# Altium PCB PCB.PcbDoc (part 1 of 6)
Units mm, origin at the board's own origin, x right, y up, seen from the top; angles counter-clockwise.
Board outline 190 x 64 mm, 6 copper layers (SIG 1, GND 1, SIG 2, PWR, GND 2, SIG 3), stack 1.565 mm thick; 489 components, 387 nets, 1828 pads, 1817 vias.
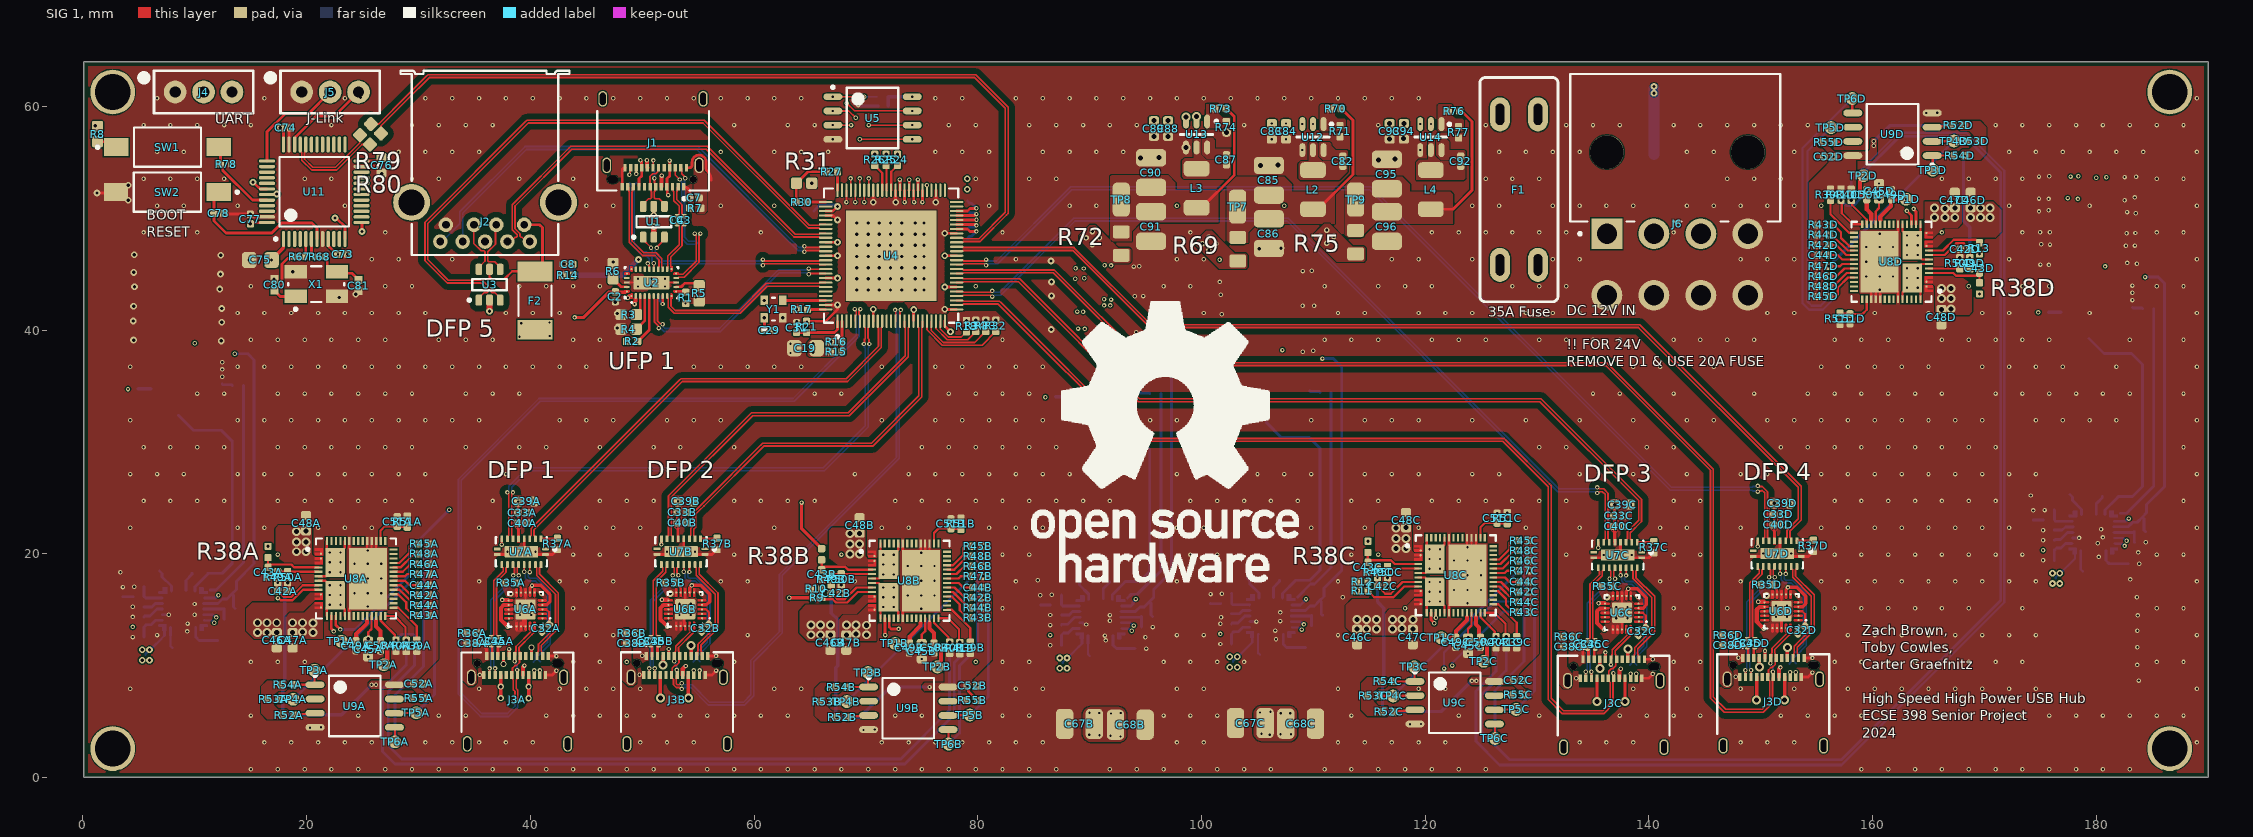
[diagram p0: SIG 1 view]
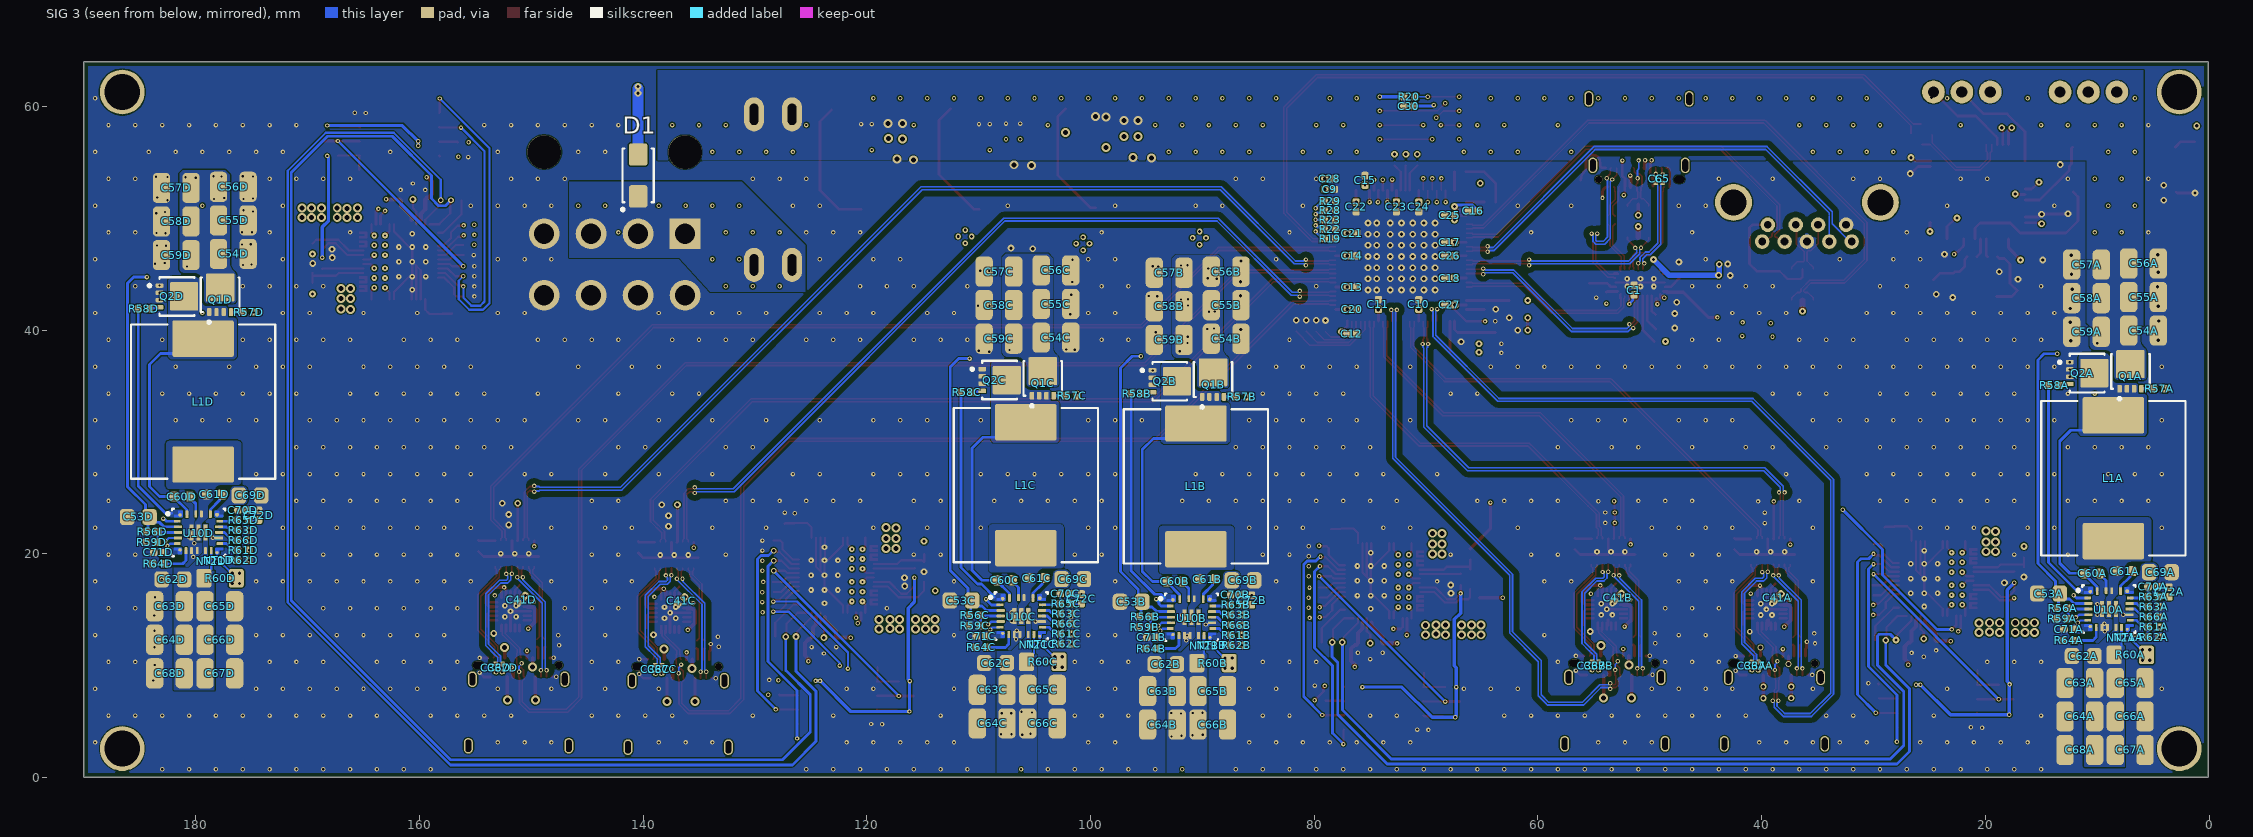
[diagram p1: SIG 3 view, seen from below]
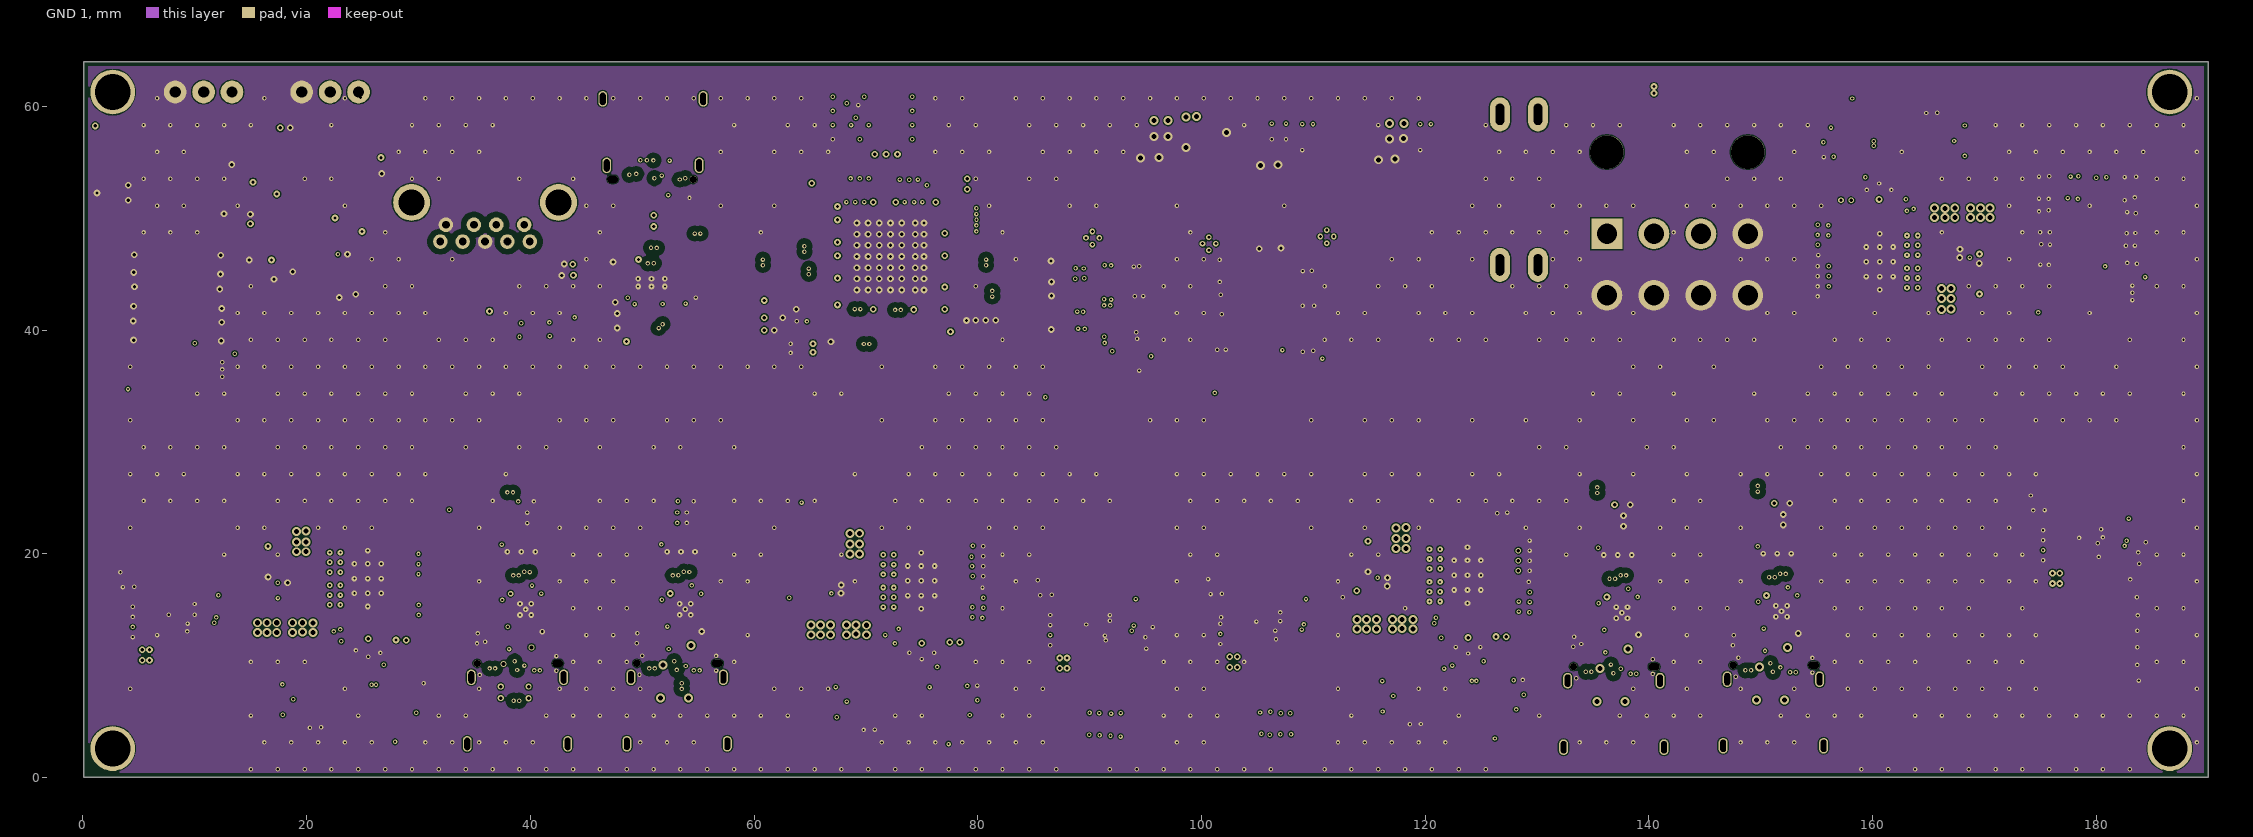
[diagram p2: GND 1]
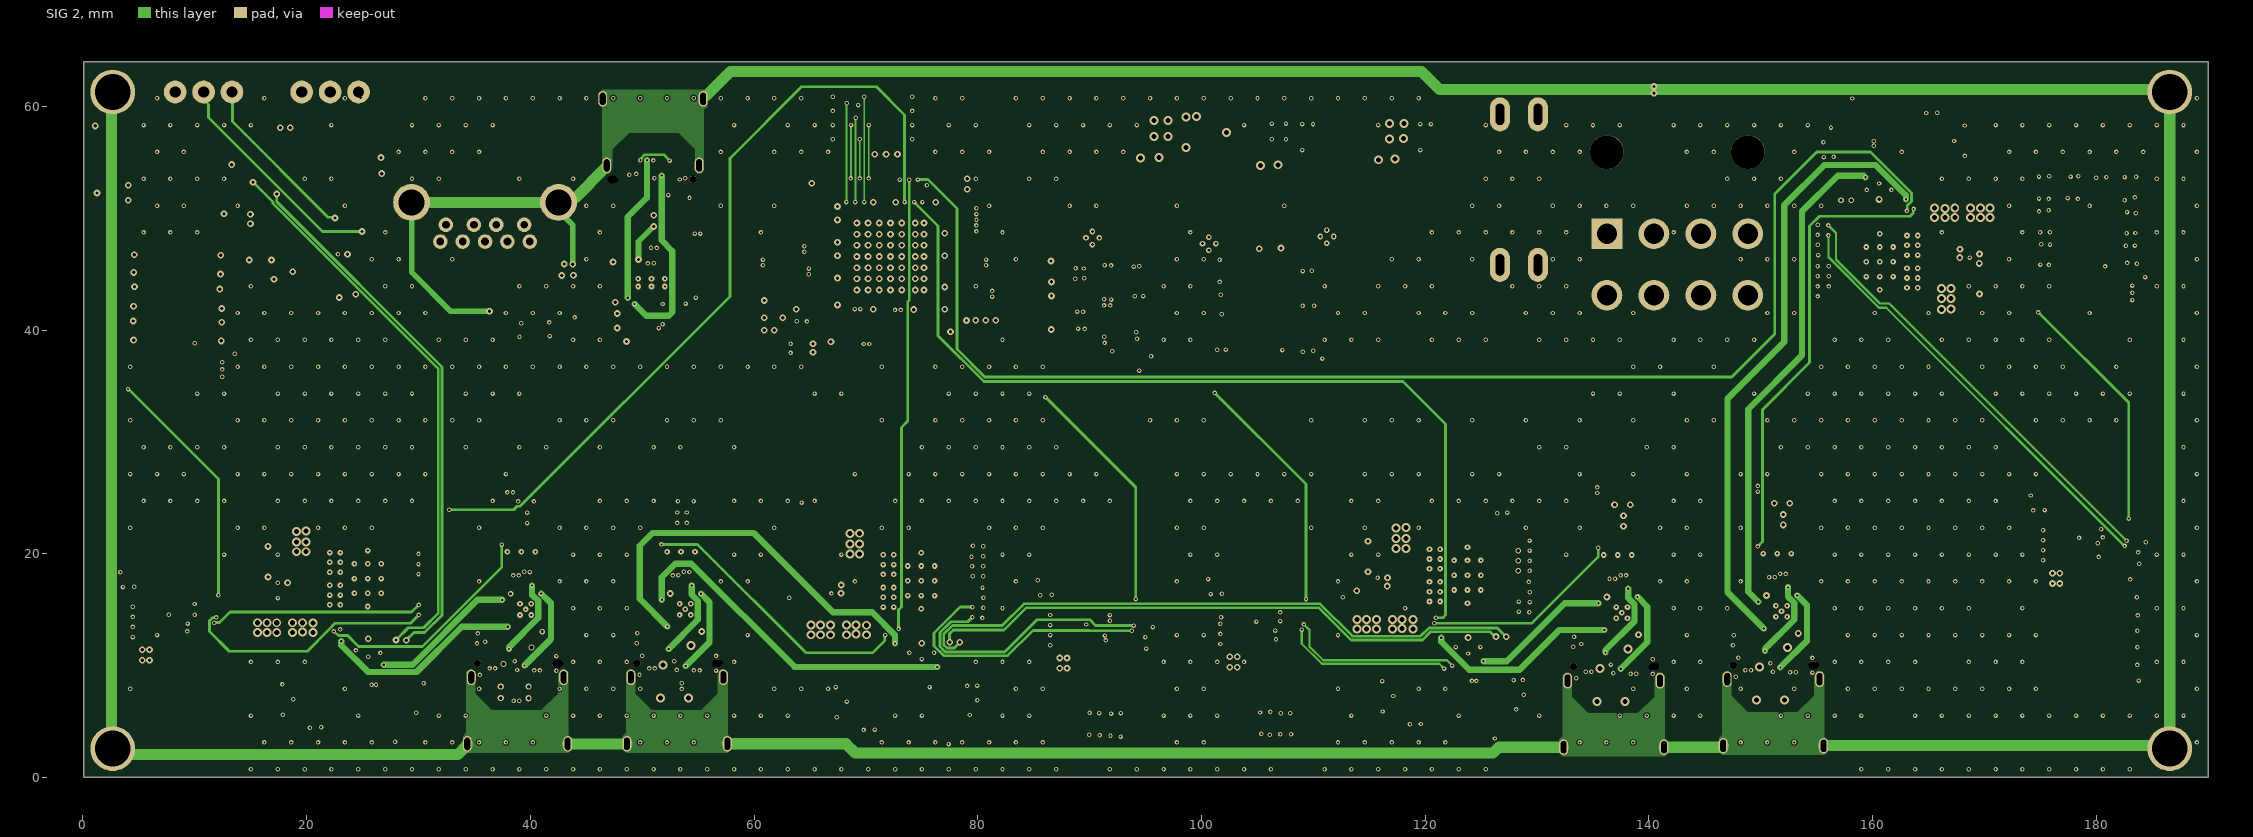
[diagram p3: SIG 2]
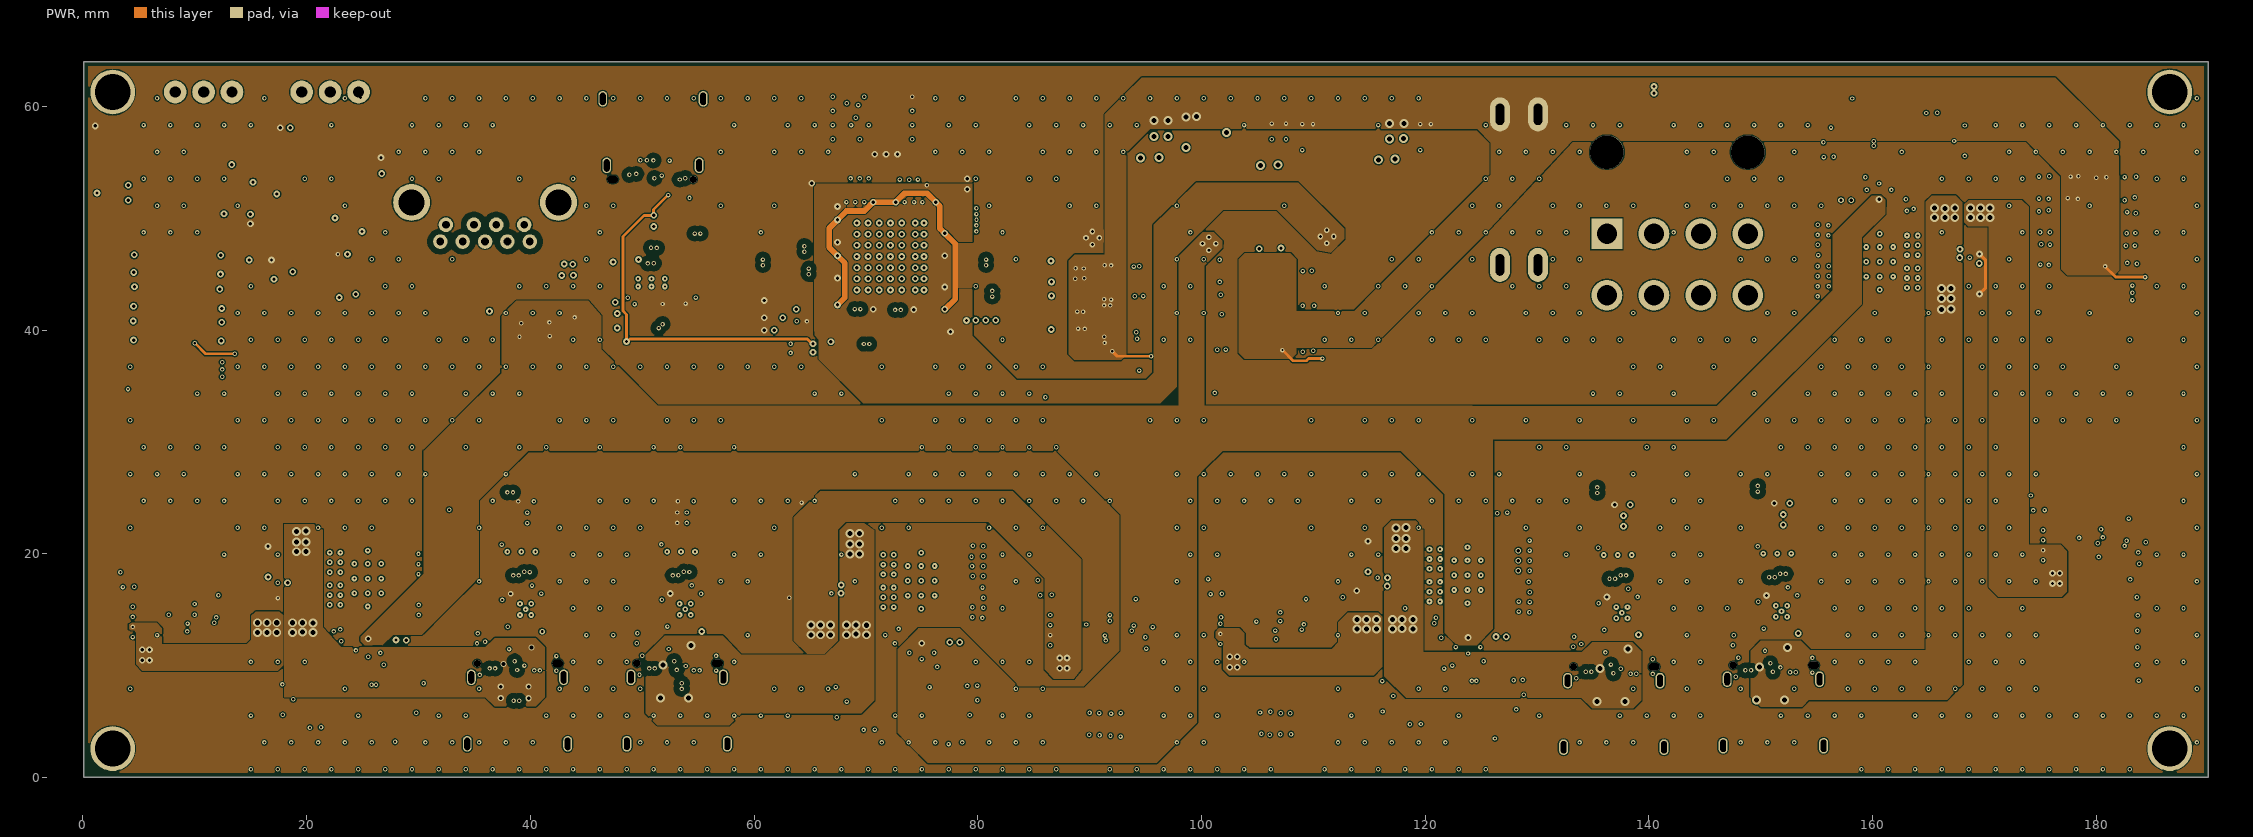
[diagram p4: PWR]
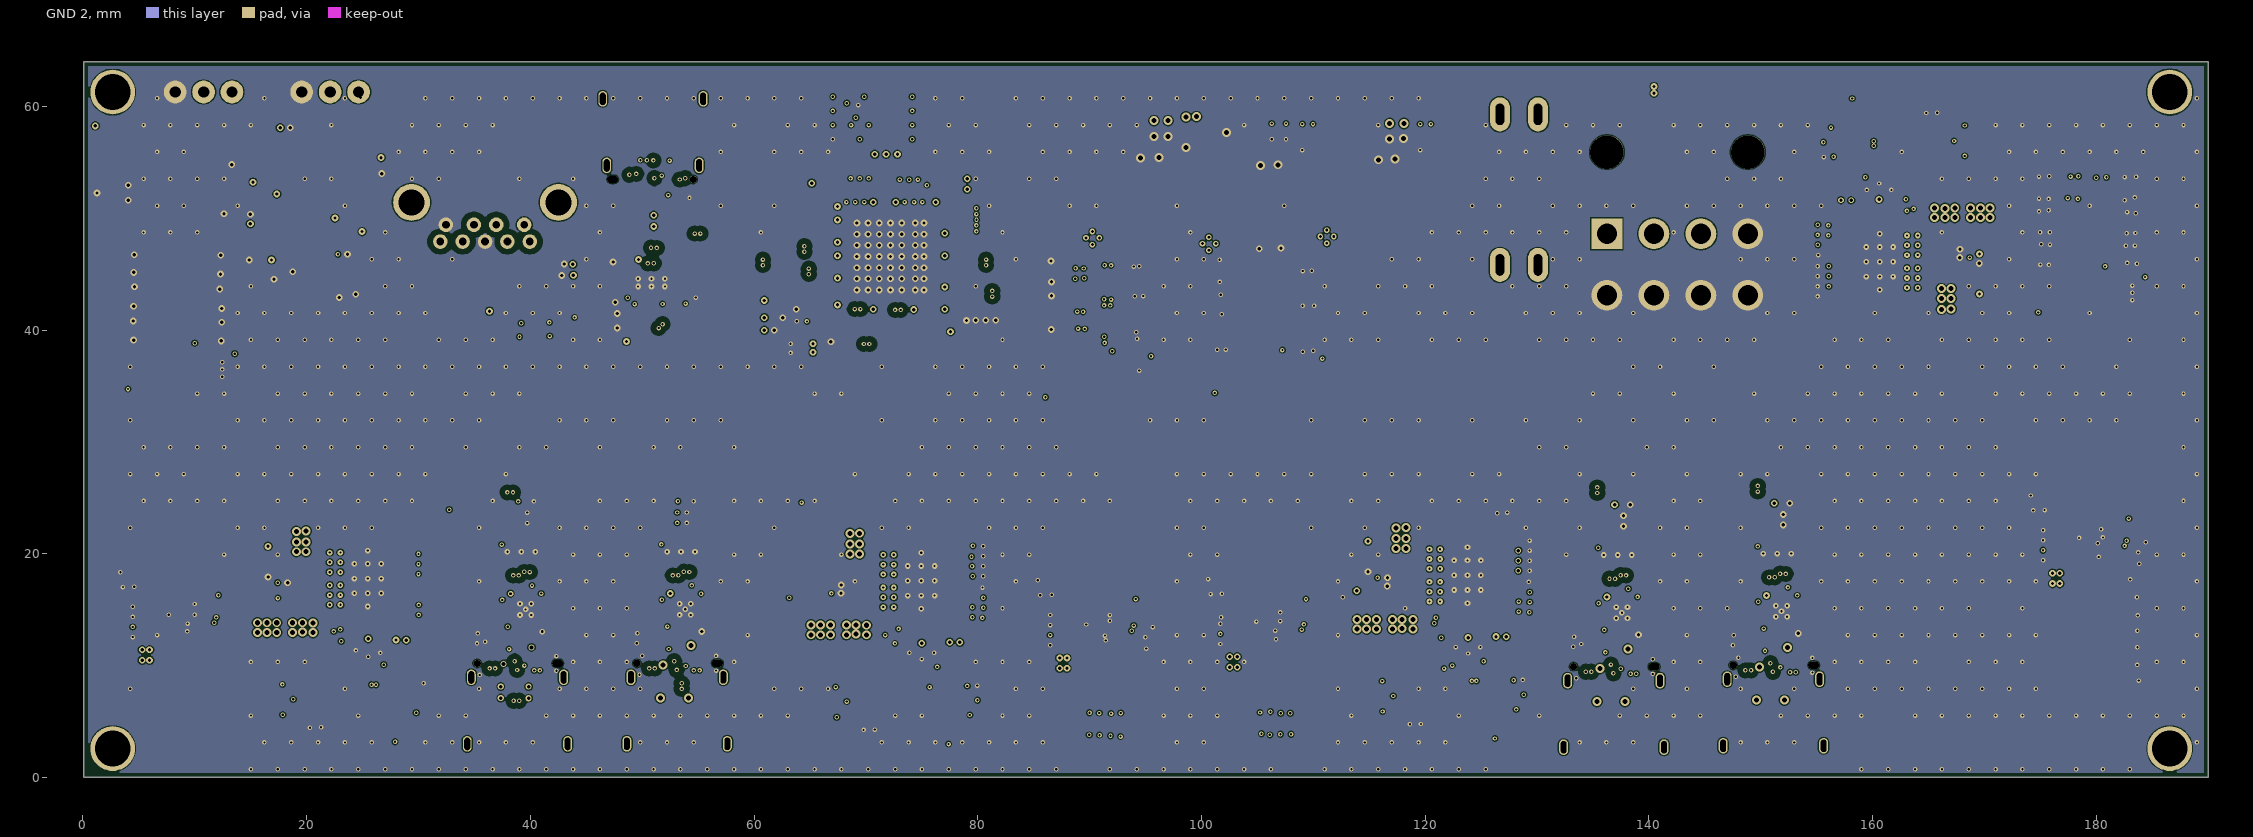
[diagram p5: GND 2]
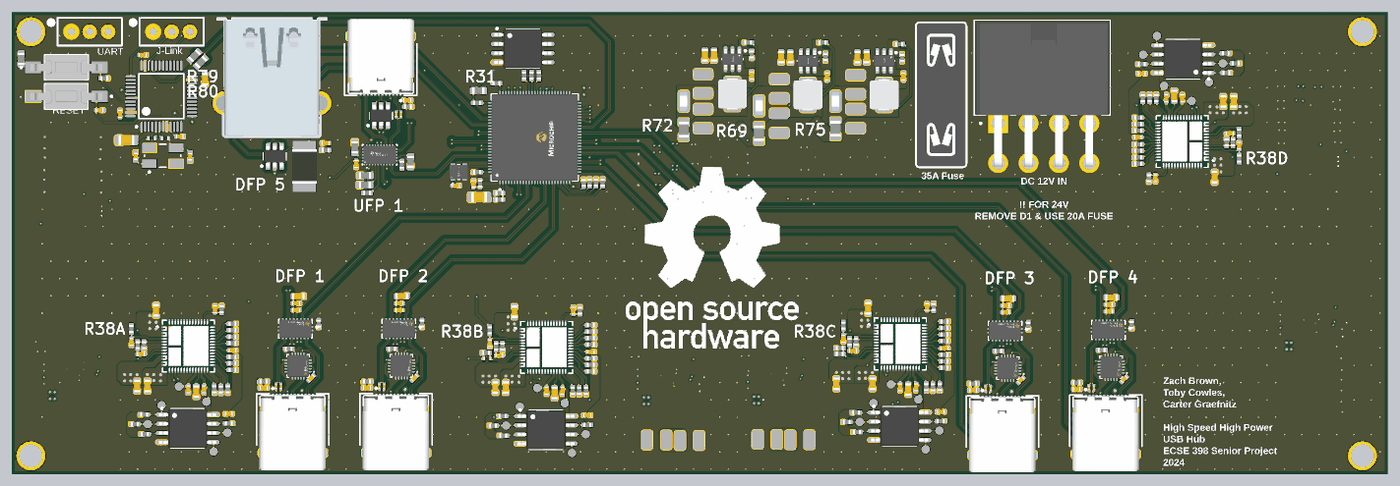
[diagram p11: 3D render of the assembled board from above, using the file's embedded part models]
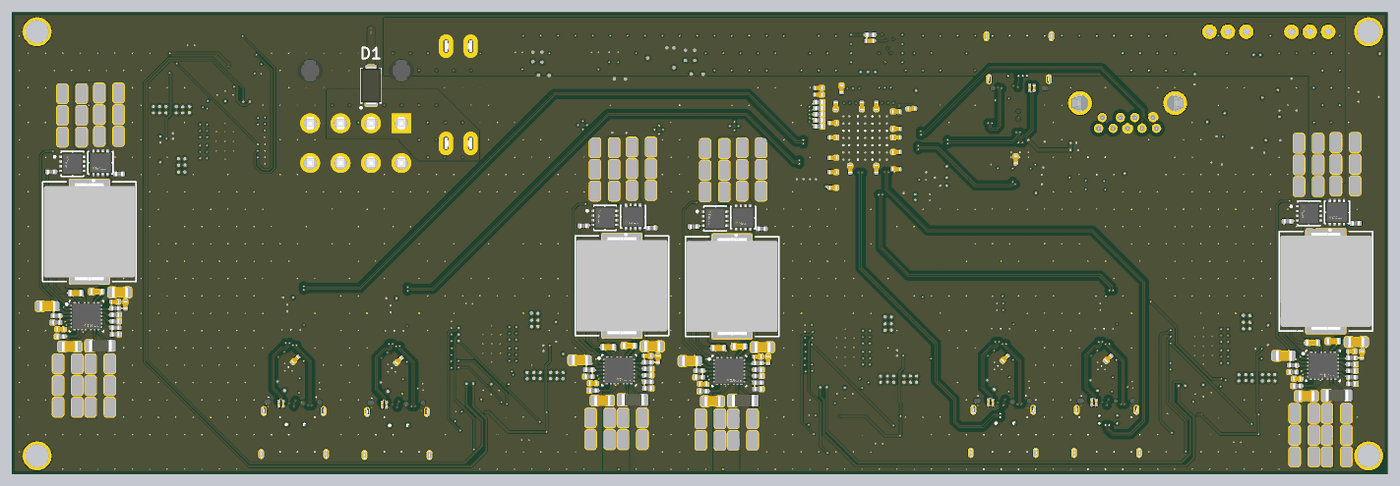
[diagram p12: 3D render of the assembled board from below, using the file's embedded part models]

## Layer stack, top to bottom
Top Solder: solder mask 0.0102, Solder Resist, Dk 3.8
SIG 1: signal copper 0.0356
Prepreg 1: prepreg 0.2104, PP-006, Dk 4.4
GND 1: signal copper 0.0175
Core 1: core 0.4, PP-006, Dk 4.6
SIG 2: signal copper 0.0175
Prepreg 2: dielectric 0.2028, FR-4, Dk 4.4
PWR: signal copper 0.0175
Core 2: core 0.4, PP-006, Dk 4.6
GND 2: signal copper 0.0175
Prepreg 3: prepreg 0.2104, PP-006, Dk 4.4
SIG 3: signal copper 0.0356
Bottom Solder: solder mask 0.0102, Solder Resist, Dk 3.8

## Board outline
0.05,0.03 0.05,64.03 190.05,64.03 190.05,0.03

## Design rules (kind name [scope] priority, off if disabled: settings)
BoardOutlineClearance [All] p1: gap=0.4 ignorepadtopadclearanceinfootprint=FALSE except(0: Arc-SplitContinuation Track-SplitContinuation SMDPad-SplitContinuation THPad-SplitContinuation Via-SplitContinuation Fill-SplitContinuation Poly-SplitContinuation Region-SplitContinuation Text-SplitContinuation)
Clearance "USB3 Clearance" [InPolygon vs InNetClass('USB3')] p1: gap=0.5 ignorepadtopadclearanceinfootprint=FALSE
Clearance "USB2 Clearance" [InPolygon vs InNetClass('USB2')] p2: gap=0.5 ignorepadtopadclearanceinfootprint=FALSE
Clearance "Global Clearance" [All] p3: gap=0.1 ignorepadtopadclearanceinfootprint=FALSE except(0.09: Arc-Arc Arc-Track Track-Track; 0.15: Arc-Text Track-Text SMDPad-SMDPad SMDPad-Text THPad-Text Via-Text Fill-Text Poly-Text Region-Text Text-Hole; 0.2: Arc-Hole Track-Hole)
ComponentClearance ComponentClearance_Pin_Headers [HasFootprint('HDDR_14x1_0')] p1: gap=0 collisioncheckmode=3 verticalgap=0 showdistances=FALSE
ComponentClearance [All] p2: gap=0.254 collisioncheckmode=3 verticalgap=0.254 showdistances=FALSE
DiffPairsRouting DiffPairsRouting_USB_2 [InNetClass('USB2')] p1: maxlimit=0.127 minlimit=0.102 mostfreqgap=0.102 toplayer_maxgap=0.102 toplayer_minwidth=0.152 toplayer_maxwidth=0.152 toplayer_prefwidth=0.152 midlayer2_maxgap=0.102 midlayer2_minwidth=0.152 midlayer2_maxwidth=0.152 midlayer2_prefwidth=0.152 midlayer3_maxgap=0.102 midlayer3_minwidth=0.152 midlayer3_maxwidth=0.152 midlayer3_prefwidth=0.152 bottomlayer_maxgap=0.102 bottomlayer_minwidth=0.152 bottomlayer_maxwidth=0.152 bottomlayer_prefwidth=0.152 impedanceprofiledriven=TRUE impedanceprofileid={6AC2E1D0-90B3-4429-8039-F66B67928875} impedanceprofilevalue=90.000000 maxuncoupledlength=0.762
DiffPairsRouting DiffPairsRouting_USB_3 [InNetClass('USB3')] p2: maxlimit=0.127 minlimit=0.102 mostfreqgap=0.102 toplayer_maxgap=0.102 toplayer_minwidth=0.152 toplayer_maxwidth=0.152 toplayer_prefwidth=0.152 midlayer2_maxgap=0.102 midlayer2_minwidth=0.152 midlayer2_maxwidth=0.152 midlayer2_prefwidth=0.152 midlayer3_maxgap=0.102 midlayer3_minwidth=0.152 midlayer3_maxwidth=0.152 midlayer3_prefwidth=0.152 bottomlayer_maxgap=0.102 bottomlayer_minwidth=0.152 bottomlayer_maxwidth=0.152 bottomlayer_prefwidth=0.152 impedanceprofiledriven=TRUE impedanceprofileid={6AC2E1D0-90B3-4429-8039-F66B67928875} impedanceprofilevalue=90.000000 maxuncoupledlength=0.254
HoleSize HoleSizePTH [IsPad] p1: absolutevalues=TRUE maxlimit=6.3 minlimit=0.5 maxpercent=80.000 minpercent=20.000
HoleSize HoleSizeVia [IsVia] p2: absolutevalues=TRUE maxlimit=6.3 minlimit=0.15 maxpercent=80.000 minpercent=20.000
HoleToHoleClearance ViaHoleToHoleClearance [IsVia vs IsVia] p1: gap=0.2 allowstackedmicrovias=TRUE
HoleToHoleClearance PTHHoleToHoleClearance [IsPad vs IsPad] p2: gap=0.45 allowstackedmicrovias=TRUE
MatchedLengths "USB 2 Matched Length" [InNetClass('USB2')] p1: tolerance=25.4 checknetsindiffpair=TRUE checkdiffpairvsdiffpair=FALSE checkxsignals=FALSE checkothers=FALSE usedelayunits=TRUE delaytolerance=100.000000
MatchedLengths "USB3 Matched Length" [InNetClass('USB3')] p2: tolerance=0.127 checknetsindiffpair=TRUE checkdiffpairvsdiffpair=FALSE checkxsignals=FALSE checkothers=FALSE usedelayunits=TRUE delaytolerance=15.000000
MinimumAnnularRing MinimumAnnularRingPTH [IsPad] p1: minimumring=0.2
MinimumAnnularRing MinimumAnnularRingVia [IsVia] p2: minimumring=0.1
MinimumSolderMaskSliver [All] p1: minsoldermaskwidth=0
PolygonConnect [All] p1: connectstyle=Direct reliefconductorwidth=0.254 reliefentries=4 polygonreliefangle="90 Angle" airgapwidth=0.254
ReturnPath [All] p1: impedanceprofileid={6AC2E1D0-90B3-4429-8039-F66B67928875} _gaplimit=0.127
RoomDefinition "PD ControllerB" [InComponentClass('PD ControllerB')] p1: confinementstyle=ConfineIn formatcopy=TRUE lockcomponents=FALSE outline 64.1,-0.154 82.8,-0.154 82.8,24.5 64.1,24.5
RoomDefinition "PD ControllerA" [InComponentClass('PD ControllerA')] p2: confinementstyle=ConfineIn formatcopy=TRUE lockcomponents=FALSE outline 14.6,0.046 33.3,0.046 33.3,24.7 14.6,24.7
RoomDefinition PORT4 [InComponentClass('PORT4')] p3: confinementstyle=ConfineIn formatcopy=TRUE lockcomponents=FALSE outline 146,0.1 156.3,0.1 156.3,26.058 146,26.058
RoomDefinition "PD ControllerD" [InComponentClass('PD ControllerD')] p4: confinementstyle=ConfineIn formatcopy=TRUE lockcomponents=FALSE outline 171.5,63.879 152.8,63.879 152.8,39.225 171.5,39.225
RoomDefinition "PD RegulatorB" [InComponentClass('PD RegulatorB')] p5: confinementstyle=ConfineIn formatcopy=TRUE lockcomponents=FALSE outline 83.184,47.026 83.184,0.29 97.916,0.29 97.916,47.026
RoomDefinition "PD RegulatorC" [InComponentClass('PD RegulatorC')] p6: confinementstyle=ConfineIn formatcopy=TRUE lockcomponents=FALSE outline 98.403,47.133 98.403,0.397 113.135,0.397 113.135,47.133
RoomDefinition "PD RegulatorD" [InComponentClass('PD RegulatorD')] p7: confinementstyle=ConfineIn formatcopy=TRUE lockcomponents=FALSE outline 171.964,54.611 171.964,7.875 186.696,7.875 186.696,54.611
RoomDefinition "PD RegulatorA" [InComponentClass('PD RegulatorA')] p8: confinementstyle=ConfineIn formatcopy=TRUE lockcomponents=FALSE outline 1.154,47.756 1.154,1.02 15.886,1.02 15.886,47.756
RoomDefinition HUB [InComponentClass('HUB')] p9: confinementstyle=ConfineIn formatcopy=TRUE lockcomponents=FALSE outline 57.3,35.55 90,35.55 90,62.55 57.3,62.55
RoomDefinition "UFP Type-C" [InComponentClass('UFP Type-C')] p10: confinementstyle=ConfineIn formatcopy=TRUE lockcomponents=FALSE outline 57.443,63.478 43.6,63.478 43.6,29.075 57.443,29.075
RoomDefinition Main [InComponentClass('Main')] p11: confinementstyle=ConfineIn formatcopy=TRUE lockcomponents=FALSE outline 44.725,63.504 26.75,63.504 26.75,39.175 44.725,39.175
RoomDefinition PORT1 [InComponentClass('PORT1')] p12: confinementstyle=ConfineIn formatcopy=TRUE lockcomponents=FALSE outline 33.7,0.267 44,0.267 44,26.225 33.7,26.225
RoomDefinition PORT3 [InComponentClass('PORT3')] p13: confinementstyle=ConfineIn formatcopy=TRUE lockcomponents=FALSE outline 131.73,-0.028 142.03,-0.028 142.03,25.93 131.73,25.93
RoomDefinition PORT2 [InComponentClass('PORT2')] p14: confinementstyle=ConfineIn formatcopy=TRUE lockcomponents=FALSE outline 47.975,0.275 58.275,0.275 58.275,26.233 47.975,26.233
RoomDefinition Power [InComponentClass('Power')] p15: confinementstyle=ConfineIn formatcopy=TRUE lockcomponents=FALSE outline 91.694,41.275 152.4,41.275 152.4,63.5 91.694,63.5
RoomDefinition "PD ControllerC" [InComponentClass('PD ControllerC')] p16: confinementstyle=ConfineIn formatcopy=TRUE lockcomponents=FALSE outline 112.95,0.5 131.65,0.5 131.65,25 112.95,25
RoomDefinition Microcontroller [InComponentClass('Microcontroller')] p17: confinementstyle=ConfineIn formatcopy=TRUE lockcomponents=FALSE outline -0.093,41.515 29.447,41.515 29.447,63.5 -0.093,63.5
RoutingVias [All] p1: holewidth=0.2 width=0.4 viastyle="Through Hole" minholewidth=0.15 minwidth=0.25 maxholewidth=6.3 maxwidth=6.3
SilkToSilkClearance [All] p1: silktosilkclearance=0
SilkToSolderMaskClearance [IsPad] p1: minsilkscreentomaskgap=0.15 clearancetoexposedcopper=TRUE
SolderMaskExpansion [All] p1: expansion=0.102 istentingtop=FALSE
SupplyNets "Schematic Supply Nets_7" [InNet('VINUP')] p1: voltage=0.000
SupplyNets "Schematic Supply Nets_6" [InNet('GND')] p2: voltage=0.000
SupplyNets "Schematic Supply Nets_5" [InNet('P5V0')] p3: voltage=0.000
SupplyNets "Schematic Supply Nets_4" [InNet('P1V1')] p4: voltage=0.000
SupplyNets "Schematic Supply Nets_3" [InNet('P3V3')] p5: voltage=0.000
SupplyNets "Schematic Supply Nets_2" [InNet('VIN')] p6: voltage=0.000
SupplyNets "Schematic Supply Nets_1" [InNet('P5V0_UFP')] p7: voltage=0.000
SupplyNets "Schematic Supply Nets" [InNet('CHASSIS')] p8: voltage=0.000
Width Width_CC [InNetClass('CC')] p1: maxlimit=0.563 minlimit=0.254 preferedwidth=0.563 toplayer_minwidth=0.367 toplayer_maxwidth=0.367 toplayer_prefwidth=0.367 midlayer2_minwidth=0.563 midlayer3_minwidth=0.563 bottomlayer_minwidth=0.367 bottomlayer_maxwidth=0.367 bottomlayer_prefwidth=0.367 impedanceprofiledriven=TRUE impedanceprofileid={2896DB28-B6F7-41C2-A94A-582FE85EF1DA} impedanceprofilevalue=50.000000 minimp=50.000000 maximp=50.000000 favimp=50.000000 // 50 Ohm Impedance for CC nets
Width [All] p2: maxlimit=10 minlimit=0.09 preferedwidth=0.25 midlayer1_minwidth=0.15 midlayer2_minwidth=0.15 midlayer3_minwidth=0.15 midlayer4_minwidth=0.15 minimp=50.000000 maximp=50.000000 favimp=50.000000
23 further rules are at their usual default settings.

## Classes and differential pairs
net class CC: C_CC1A C_CC1B C_CC1C C_CC1D C_CC2A C_CC2B C_CC2C C_CC2D CC1A CC1B CC1C CC1D CC2A CC2B CC2C CC2D
net class USB3: C_USB3_TX1_N C_USB3_TX1_P C_USB3_TX2_N C_USB3_TX2_P DP1_USB3_RX_N DP1_USB3_RX_P DP1_USB3_TX_N DP1_USB3_TX_P DP2_USB3_RX_N DP2_USB3_RX_P DP2_USB3_TX_N DP2_USB3_TX_P DP3_USB3_RX_N DP3_USB3_RX_P DP3_USB3_TX_N DP3_USB3_TX_P DP4_USB3_RX_N DP4_USB3_RX_P DP4_USB3_TX_N DP4_USB3_TX_P DP5_USB3_RX_N DP5_USB3_RX_P DP5_USB3_TX_N DP5_USB3_TX_P UP_USB3_RX_N UP_USB3_RX_P UP_USB3_TX_N UP_USB3_TX_P USB3_RX1_N USB3_RX1_P USB3_RX1A_N USB3_RX1A_P USB3_RX1B_N USB3_RX1B_P USB3_RX1C_N USB3_RX1C_P USB3_RX1D_N USB3_RX1D_P USB3_RX2_N USB3_RX2_P USB3_RX2A_N USB3_RX2A_P USB3_RX2B_N USB3_RX2B_P USB3_RX2C_N USB3_RX2C_P USB3_RX2D_N USB3_RX2D_P USB3_TX1_N USB3_TX1_P USB3_TX1A_N USB3_TX1A_P USB3_TX1B_N USB3_TX1B_P USB3_TX1C_N USB3_TX1C_P USB3_TX1D_N USB3_TX1D_P USB3_TX2_N USB3_TX2_P USB3_TX2A_N USB3_TX2A_P USB3_TX2B_N USB3_TX2B_P USB3_TX2C_N USB3_TX2C_P USB3_TX2D_N USB3_TX2D_P
net class USB2: AD_N AD_P C_USB2_N C_USB2_P DP1_USB2_N DP1_USB2_P DP2_USB2_N DP2_USB2_P DP3_USB2_N DP3_USB2_P DP4_USB2_N DP4_USB2_P DP5_USB2_N DP5_USB2_P DP6_USB2_N DP6_USB2_P UP_USB2_N UP_USB2_P
component class "PD RegulatorD": C53D C54D C55D C56D C57D C58D C59D C60D C61D C62D C63D C64D C65D C66D C67D C68D C69D C70D C71D C72D L1D NT1D NT2D Q1D Q2D R56D R57D R58D R59D R60D R61D R62D R63D R64D R65D R66D U10D
component class "PD RegulatorC": C53C C54C C55C C56C C57C C58C C59C C60C C61C C62C C63C C64C C65C C66C C67C C68C C69C C70C C71C C72C L1C NT1C NT2C Q1C Q2C R56C R57C R58C R59C R60C R61C R62C R63C R64C R65C R66C U10C
component class "PD RegulatorB": C53B C54B C55B C56B C57B C58B C59B C60B C61B C62B C63B C64B C65B C66B C67B C68B C69B C70B C71B C72B L1B NT1B NT2B Q1B Q2B R56B R57B R58B R59B R60B R61B R62B R63B R64B R65B R66B U10B
component class "PD RegulatorA": C53A C54A C55A C56A C57A C58A C59A C60A C61A C62A C63A C64A C65A C66A C67A C68A C69A C70A C71A C72A L1A NT1A NT2A Q1A Q2A R56A R57A R58A R59A R60A R61A R62A R63A R64A R65A R66A U10A
component class "PD ControllerD": C42D C43D C44D C45D C46D C47D C48D C49D C50D C51D C52D R13 R38D R39D R40D R41D R42D R43D R44D R45D R46D R47D R48D R49D R50D R51D R52D R53D R54D R55D TP1D TP2D TP3D TP4D TP5D TP6D U8D U9D
component class "PD ControllerC": C42C C43C C44C C45C C46C C47C C48C C49C C50C C51C C52C R11 R12 R38C R39C R40C R41C R42C R43C R44C R45C R46C R47C R48C R49C R50C R51C R52C R53C R54C R55C TP1C TP2C TP3C TP4C TP5C TP6C U8C U9C
component class "PD ControllerB": C42B C43B C44B C45B C46B C47B C48B C49B C50B C51B C52B R9 R10 R38B R39B R40B R41B R42B R43B R44B R45B R46B R47B R48B R49B R50B R51B R52B R53B R54B R55B TP1B TP2B TP3B TP4B TP5B TP6B U8B U9B
component class "PD ControllerA": C42A C43A C44A C45A C46A C47A C48A C49A C50A C51A C52A R38A R39A R40A R41A R42A R43A R44A R45A R46A R47A R48A R49A R50A R51A R52A R53A R54A R55A TP1A TP2A TP3A TP4A TP5A TP6A U8A U9A
component class Power: C82 C83 C84 C85 C86 C87 C88 C89 C90 C91 C92 C93 C94 C95 C96 D1 F1 J6 L2 L3 L4 R69 R70 R71 R72 R73 R74 R75 R76 R77 TP7 TP8 TP9 U12 U13 U14
component class Main: C8 F2 J2 R14 U3
differential pair class DIFF90: C_USB2 C_USB3_TX1 C_USB3_TX1A C_USB3_TX1B C_USB3_TX1C C_USB3_TX1D C_USB3_TX2 C_USB3_TX2A C_USB3_TX2B C_USB3_TX2C C_USB3_TX2D DP1_USB2 DP1_USB3_RX DP1_USB3_TX DP2_USB2 DP2_USB3_RX DP2_USB3_TX DP3_USB2 DP3_USB3_RX DP3_USB3_TX DP4_USB2 DP4_USB3_RX DP4_USB3_TX DP5_USB2 DP5_USB3_RX DP5_USB3_TX DP6_USB2 UP_USB2 UP_USB3_RX UP_USB3_TX USB3_RX1 USB3_RX1A USB3_RX1B USB3_RX1C USB3_RX1D USB3_RX2 USB3_RX2A USB3_RX2B USB3_RX2C USB3_RX2D USB3_TX1 USB3_TX1A USB3_TX1B USB3_TX1C USB3_TX1D USB3_TX2 USB3_TX2A USB3_TX2B USB3_TX2C USB3_TX2D
channel class "PD Regulator": "PD RegulatorA" "PD RegulatorB" "PD RegulatorC" "PD RegulatorD"
channel class "PD Controller": "PD ControllerA" "PD ControllerB" "PD ControllerC" "PD ControllerD"
channel class DFP: PORT1 PORT2 PORT3 PORT4
component class "UFP Type-C": C1 C2 C3 C4 C5 C6 C7 J1 R1 R2 R3 R4 R5 R6 R7 U1 U2
component class PORT4: C32D C33D C34D C35D C36D C37D C38D C39D C40D C41D J3D R35D R36D R37D U6D U7D
component class PORT3: C32C C33C C34C C35C C36C C37C C38C C39C C40C C41C J3C R35C R36C R37C U6C U7C
component class PORT2: C32B C33B C34B C35B C36B C37B C38B C39B C40B C41B J3B R35B R36B R37B U6B U7B
component class PORT1: C32A C33A C34A C35A C36A C37A C38A C39A C40A C41A J3A R35A R36A R37A U6A U7A
component class Microcontroller: C73 C74 C75 C76 C77 C78 C80 C81 J4 J5 R8 R67 R68 R78 R79 R80 SW1 SW2 U11 X1
component class HUB: C9 C10 C11 C12 C13 C14 C15 C16 C17 C18 C19 C20 C21 C22 C23 C24 C25 C26 C27 C28 C29 C30 C31 R15 R16 R17 R18 R19 R20 R21 R22 R23 R24 R25 R26 R27 R28 R29 R30 R31 R32 R33 R34 U4 U5 Y1
differential pair ST_USB2_D: +ST_USB2_D_P -ST_USB2_D_N
differential pair AD: +AD_P -AD_N
differential pair USB3_TX2D: +USB3_TX2D_P -USB3_TX2D_N
differential pair USB3_TX2C: +USB3_TX2C_P -USB3_TX2C_N
differential pair USB3_TX2B: +USB3_TX2B_P -USB3_TX2B_N
differential pair USB3_TX2A: +USB3_TX2A_P -USB3_TX2A_N
differential pair USB3_TX1D: +USB3_TX1D_P -USB3_TX1D_N
differential pair USB3_TX1C: +USB3_TX1C_P -USB3_TX1C_N
differential pair USB3_TX1B: +USB3_TX1B_P -USB3_TX1B_N
differential pair USB3_TX1A: +USB3_TX1A_P -USB3_TX1A_N
differential pair USB3_RX2D: +USB3_RX2D_P -USB3_RX2D_N
differential pair USB3_RX2C: +USB3_RX2C_P -USB3_RX2C_N
differential pair USB3_RX2B: +USB3_RX2B_P -USB3_RX2B_N
differential pair USB3_RX2A: +USB3_RX2A_P -USB3_RX2A_N
differential pair USB3_RX1D: +USB3_RX1D_P -USB3_RX1D_N
differential pair USB3_RX1C: +USB3_RX1C_P -USB3_RX1C_N
differential pair USB3_RX1B: +USB3_RX1B_P -USB3_RX1B_N
differential pair USB3_RX1A: +USB3_RX1A_P -USB3_RX1A_N
differential pair C_USB3_TX2D: +C_USB3_TX2D_P -C_USB3_TX2D_N
differential pair C_USB3_TX2C: +C_USB3_TX2C_P -C_USB3_TX2C_N
differential pair C_USB3_TX2B: +C_USB3_TX2B_P -C_USB3_TX2B_N
differential pair C_USB3_TX2A: +C_USB3_TX2A_P -C_USB3_TX2A_N
differential pair C_USB3_TX1D: +C_USB3_TX1D_P -C_USB3_TX1D_N
differential pair C_USB3_TX1C: +C_USB3_TX1C_P -C_USB3_TX1C_N
differential pair C_USB3_TX1B: +C_USB3_TX1B_P -C_USB3_TX1B_N
differential pair C_USB3_TX1A: +C_USB3_TX1A_P -C_USB3_TX1A_N
differential pair USB3_TX2: +USB3_TX2_P -USB3_TX2_N
differential pair USB3_TX1: +USB3_TX1_P -USB3_TX1_N
differential pair USB3_RX2: +USB3_RX2_P -USB3_RX2_N
differential pair USB3_RX1: +USB3_RX1_P -USB3_RX1_N
differential pair C_USB3_TX2: +C_USB3_TX2_P -C_USB3_TX2_N
differential pair C_USB3_TX1: +C_USB3_TX1_P -C_USB3_TX1_N
differential pair C_USB2: +C_USB2_P -C_USB2_N
differential pair UP_USB3_TX: +UP_USB3_TX_P -UP_USB3_TX_N
differential pair UP_USB3_RX: +UP_USB3_RX_P -UP_USB3_RX_N
differential pair UP_USB2: +UP_USB2_P -UP_USB2_N
differential pair DP6_USB2: +DP6_USB2_P -DP6_USB2_N
differential pair DP5_USB3_TX: +DP5_USB3_TX_P -DP5_USB3_TX_N
differential pair DP5_USB3_RX: +DP5_USB3_RX_P -DP5_USB3_RX_N
differential pair DP5_USB2: +DP5_USB2_P -DP5_USB2_N
differential pair DP4_USB3_TX: +DP4_USB3_TX_P -DP4_USB3_TX_N
differential pair DP4_USB3_RX: +DP4_USB3_RX_P -DP4_USB3_RX_N
differential pair DP4_USB2: +DP4_USB2_P -DP4_USB2_N
differential pair DP3_USB3_TX: +DP3_USB3_TX_P -DP3_USB3_TX_N
differential pair DP3_USB3_RX: +DP3_USB3_RX_P -DP3_USB3_RX_N
differential pair DP3_USB2: +DP3_USB2_P -DP3_USB2_N
differential pair DP2_USB3_TX: +DP2_USB3_TX_P -DP2_USB3_TX_N
differential pair DP2_USB3_RX: +DP2_USB3_RX_P -DP2_USB3_RX_N
differential pair DP2_USB2: +DP2_USB2_P -DP2_USB2_N
differential pair DP1_USB3_TX: +DP1_USB3_TX_P -DP1_USB3_TX_N
differential pair DP1_USB3_RX: +DP1_USB3_RX_P -DP1_USB3_RX_N
differential pair DP1_USB2: +DP1_USB2_P -DP1_USB2_N

## Components (designator, comment, footprint, x,y, rotation, side; value= is the part's Value field where it differs from the comment)
C1 "100nF 16V 0402" CAPC1005X06N 51.4,43.6 r270 bottom value=100n
C2 "100nF 16V 0402" CAPC1005X06N 47.6,43 r90 top value=100n
C3 "100nF 10V 0201" CAPC0603X03N 53.757,49.857 r90 top value=100n
C4 "100nF 10V 0201" CAPC0603X03N 53.122,49.857 r90 top value=100n
C5 "100nF 10V 0201" CAPC0603X03N 48.848,53.546 r90 bottom value=100n
C6 "100nF 10V 0201" CAPC0603X03N 49.467,53.538 r90 bottom value=100n
C7 "100nF 16V 0402" CAPC1005X06N 54.661,51.833 r0 top value=100n
C8 "100nF 16V 0402" CAPC1005X06N 43.375,45.9 r180 top value=100n
C9 "4.7uF 10V 0402" CAPC1005X06N 78.632,52.6 r180 bottom value=4u7
C10 "100nF 16V 0402" CAPC1005X06N 70.662,42.307 r270 bottom value=100n
C11 "100nF 16V 0402" CAPC1005X06N 74.262,42.307 r270 bottom value=100n
C12 "100nF 16V 0402" CAPC1005X06N 76.632,39.7 r0 bottom value=100n
C13 "100nF 16V 0402" CAPC1005X06N 76.624,43.869 r0 bottom value=100n
C14 "100nF 16V 0402" CAPC1005X06N 76.624,46.669 r0 bottom value=100n
C15 "100nF 16V 0402" CAPC1005X06N 75.462,53.409 r270 bottom value=100n
C16 "100nF 16V 0402" CAPC1005X06N 65.782,50.669 r180 bottom value=100n
C17 "100nF 16V 0402" CAPC1005X06N 67.9,47.869 r180 bottom value=100n
C18 "100nF 16V 0402" CAPC1005X06N 67.9,44.669 r180 bottom value=100n
C19 "2.2uF 50V 0805" CAPC2012X14N 64.6,38.4 r180 top value=2u2
C20 "100nF 16V 0402" CAPC1005X06N 76.624,41.869 r0 bottom value=100n
C21 "100nF 16V 0402" CAPC1005X06N 76.624,48.669 r0 bottom value=100n
C22 "100nF 16V 0402" CAPC1005X06N 76.262,51.031 r90 bottom value=100n
C23 "100nF 16V 0402" CAPC1005X06N 72.662,51.031 r90 bottom value=100n
C24 "100nF 16V 0402" CAPC1005X06N 70.662,51.031 r90 bottom value=100n
C25 "100nF 16V 0402" CAPC1005X06N 67.9,50.265 r180 bottom value=100n
C26 "100nF 16V 0402" CAPC1005X06N 67.9,46.669 r180 bottom value=100n
C27 "100nF 16V 0402" CAPC1005X06N 67.9,42.275 r180 bottom value=100n
C28 "4.7uF 10V 0402" CAPC1005X06N 78.632,53.546 r180 bottom value=4u7
C29 "100nF 16V 0402" CAPC1005X06N 61.355,40 r0 top value=100n
C30 "100nF 16V 0402" CAPC1005X06N 71.57,60.05 r0 bottom value=100n
C31 "10n 50V X7R 0402" CAPC1005X06N 63.8,40.245 r90 top value=10n
C32A "100nF 16V 0402" CAPC1005X06N 41.366,13.366 r45 top value=100n (schematic designator C32)
C32B "100nF 16V 0402" CAPC1005X06N 55.641,13.374 r45 top value=100n (schematic designator C32)
C32C "100nF 16V 0402" CAPC1005X06N 139.397,13.071 r45 top value=100n (schematic designator C32)
C32D "100nF 16V 0402" CAPC1005X06N 153.666,13.199 r45 top value=100n (schematic designator C32)
C33A "1uF 16V X5R 0402" CAPC1005X06N 39.29,23.7 r0 top value=1u (schematic designator C33)
C33B "1uF 16V X5R 0402" CAPC1005X06N 53.565,23.708 r0 top value=1u (schematic designator C33)
C33C "1uF 16V X5R 0402" CAPC1005X06N 137.321,23.405 r0 top value=1u (schematic designator C33)
C33D "1uF 16V X5R 0402" CAPC1005X06N 151.59,23.533 r0 top value=1u (schematic designator C33)
C34A "100nF 10V 0201" CAPC0603X03N 36.5,12.2 r90 top value=100n (schematic designator C34)
C34B "100nF 10V 0201" CAPC0603X03N 50.775,12.208 r90 top value=100n (schematic designator C34)
C34C "100nF 10V 0201" CAPC0603X03N 134.53,11.905 r90 top value=100n (schematic designator C34)
C34D "100nF 10V 0201" CAPC0603X03N 148.8,12.033 r90 top value=100n (schematic designator C34)
C35A "100nF 10V 0201" CAPC0603X03N 37.2,12.2 r90 top value=100n (schematic designator C35)
C35B "100nF 10V 0201" CAPC0603X03N 51.475,12.208 r90 top value=100n (schematic designator C35)
C35C "100nF 10V 0201" CAPC0603X03N 135.23,11.905 r90 top value=100n (schematic designator C35)
C35D "100nF 10V 0201" CAPC0603X03N 149.5,12.033 r90 top value=100n (schematic designator C35)
C36A "100nF 10V 0201" CAPC0603X03N 40.9,10 r90 bottom value=100n (schematic designator C36)
C36B "100nF 10V 0201" CAPC0603X03N 55.175,10.008 r90 bottom value=100n (schematic designator C36)
C36C "100nF 10V 0201" CAPC0603X03N 138.93,9.705 r90 bottom value=100n (schematic designator C36)
C36D "100nF 10V 0201" CAPC0603X03N 153.2,9.833 r90 bottom value=100n (schematic designator C36)
C37A "100nF 10V 0201" CAPC0603X03N 40.282,9.982 r90 bottom value=100n (schematic designator C37)
C37B "100nF 10V 0201" CAPC0603X03N 54.557,9.991 r90 bottom value=100n (schematic designator C37)
C37C "100nF 10V 0201" CAPC0603X03N 138.313,9.688 r90 bottom value=100n (schematic designator C37)
C37D "100nF 10V 0201" CAPC0603X03N 152.582,9.816 r90 bottom value=100n (schematic designator C37)
C38A "100nF 16V 0402" CAPC1005X06N 34.8,12 r180 top value=100n (schematic designator C38)
C38B "100nF 16V 0402" CAPC1005X06N 49.075,12.008 r180 top value=100n (schematic designator C38)
C38C "100nF 16V 0402" CAPC1005X06N 132.83,11.705 r180 top value=100n (schematic designator C38)
C38D "100nF 16V 0402" CAPC1005X06N 147.1,11.833 r180 top value=100n (schematic designator C38)
C39A "1nF C0G 0603" CAPC1608X08N 39.62,24.7 r0 top value=1n (schematic designator C39)
C39B "1nF C0G 0603" CAPC1608X08N 53.895,24.708 r0 top value=1n (schematic designator C39)
C39C "1nF C0G 0603" CAPC1608X08N 137.651,24.405 r0 top value=1n (schematic designator C39)
C39D "1nF C0G 0603" CAPC1608X08N 151.92,24.533 r0 top value=1n (schematic designator C39)
C40A "100nF 16V 0402" CAPC1005X06N 39.29,22.764 r0 top value=100n (schematic designator C40)
C40B "100nF 16V 0402" CAPC1005X06N 53.565,22.772 r0 top value=100n (schematic designator C40)
C40C "100nF 16V 0402" CAPC1005X06N 137.321,22.47 r0 top value=100n (schematic designator C40)
C40D "100nF 16V 0402" CAPC1005X06N 151.59,22.597 r0 top value=100n (schematic designator C40)
C41A "10uF 10V 0402" CAPC1005X06N 38.593,16.094 r315 bottom value=10u (schematic designator C41)
C41B "10uF 10V 0402" CAPC1005X06N 52.868,16.102 r315 bottom value=10u (schematic designator C41)
C41C "10uF 10V 0402" CAPC1005X06N 136.624,15.8 r315 bottom value=10u (schematic designator C41)
C41D "10uF 10V 0402" CAPC1005X06N 150.893,15.927 r315 bottom value=10u (schematic designator C41)
C42A "10uF 10V 0402" CAPC1005X06N 17.85,16.675 r0 top value=10u (schematic designator C42)
C42B "10uF 10V 0402" CAPC1005X06N 67.35,16.475 r0 top value=10u (schematic designator C42)
C42C "10uF 10V 0402" CAPC1005X06N 116.2,17.129 r0 top value=10u (schematic designator C42)
C42D "10uF 10V 0402" CAPC1005X06N 168.267,47.25 r180 top value=10u (schematic designator C42)
C43A "10uF 10V 0402" CAPC1005X06N 16.55,18.375 r270 top value=10u (schematic designator C43)
C43B "10uF 10V 0402" CAPC1005X06N 66.05,18.175 r270 top value=10u (schematic designator C43)
C43C "10uF 10V 0402" CAPC1005X06N 114.9,18.829 r270 top value=10u (schematic designator C43)
C43D "10uF 10V 0402" CAPC1005X06N 169.567,45.55 r90 top value=10u (schematic designator C43)
C44A "10uF 10V 0402" CAPC1005X06N 30.5,17.2 r0 top value=10u (schematic designator C44)
C44B "10uF 10V 0402" CAPC1005X06N 80,17 r0 top value=10u (schematic designator C44)
C44C "10uF 10V 0402" CAPC1005X06N 128.85,17.5 r0 top value=10u (schematic designator C44)
C44D "10uF 10V 0402" CAPC1005X06N 155.6,46.725 r180 top value=10u (schematic designator C44)
C45A "22uF 10V 0603 X5R" CAPC1608X08N 25.5,11.5 r270 top value=22uF (schematic designator C45)
C45B "22uF 10V 0603 X5R" CAPC1608X08N 75,11.3 r270 top value=22uF (schematic designator C45)
C45C "22uF 10V 0603 X5R" CAPC1608X08N 123.85,11.8 r270 top value=22uF (schematic designator C45)
C45D "22uF 10V 0603 X5R" CAPC1608X08N 160.6,52.425 r90 top value=22uF (schematic designator C45)
C46A "10uF 35V 0603" CAPC1608X08N 17.325,12.275 r270 top value=10u (schematic designator C46)
C46B "10uF 35V 0603" CAPC1608X08N 66.825,12.075 r270 top value=10u (schematic designator C46)
C46C "10uF 35V 0603" CAPC1608X08N 113.933,12.575 r270 top value=10u (schematic designator C46)
C46D "10uF 35V 0603" CAPC1608X08N 168.792,51.65 r90 top value=10u (schematic designator C46)
C47A "10uF 35V 0603" CAPC1608X08N 18.75,12.275 r270 top value=10u (schematic designator C47)
C47B "10uF 35V 0603" CAPC1608X08N 68.25,12.075 r270 top value=10u (schematic designator C47)
C47C "10uF 35V 0603" CAPC1608X08N 118.908,12.575 r270 top value=10u (schematic designator C47)
C47D "10uF 35V 0603" CAPC1608X08N 167.367,51.65 r90 top value=10u (schematic designator C47)
C48A "10uF 35V 0603" CAPC1608X08N 19.95,22.75 r90 top value=10u (schematic designator C48)
C48B "10uF 35V 0603" CAPC1608X08N 69.45,22.55 r90 top value=10u (schematic designator C48)
C48C "10uF 35V 0603" CAPC1608X08N 118.3,23.025 r90 top value=10u (schematic designator C48)
C48D "10uF 35V 0603" CAPC1608X08N 166.167,41.175 r270 top value=10u (schematic designator C48)
C49A "220pF 50V 0402" CAPC1005X06N 24.4,11.8 r270 top value=220p (schematic designator C49)
C49B "220pF 50V 0402" CAPC1005X06N 73.9,11.6 r270 top value=220p (schematic designator C49)
C49C "220pF 50V 0402" CAPC1005X06N 122.75,12.1 r270 top value=220p (schematic designator C49)
C49D "220pF 50V 0402" CAPC1005X06N 161.7,52.125 r90 top value=220p (schematic designator C49)
C50A "220pF 50V 0402" CAPC1005X06N 26.6,11.8 r270 top value=220p (schematic designator C50)
C50B "220pF 50V 0402" CAPC1005X06N 76.1,11.6 r270 top value=220p (schematic designator C50)
C50C "220pF 50V 0402" CAPC1005X06N 124.95,12.1 r270 top value=220p (schematic designator C50)
C50D "220pF 50V 0402" CAPC1005X06N 159.5,52.125 r90 top value=220p (schematic designator C50)
C51A "10n 50V X7R 0402" CAPC1005X06N 28.1,22.9 r90 top value=10n (schematic designator C51)
C51B "10n 50V X7R 0402" CAPC1005X06N 77.6,22.7 r90 top value=10n (schematic designator C51)
C51C "10n 50V X7R 0402" CAPC1005X06N 126.45,23.2 r90 top value=10n (schematic designator C51)
C51D "10n 50V X7R 0402" CAPC1005X06N 158,41.025 r270 top value=10n (schematic designator C51)
C52A "100nF 16V 0402" CAPC1005X06N 30,8.4 r0 top value=100n (schematic designator C52)
C52B "100nF 16V 0402" CAPC1005X06N 79.5,8.2 r0 top value=100n (schematic designator C52)
C52C "100nF 16V 0402" CAPC1005X06N 128.35,8.7 r0 top value=100n (schematic designator C52)
C52D "100nF 16V 0402" CAPC1005X06N 156.1,55.525 r180 top value=100n (schematic designator C52)
C53A "2.2uF 50V 0805" CAPC2012X14N 14.344,16.457 r0 bottom value=2u2 (schematic designator C53)
C53B "2.2uF 50V 0805" CAPC2012X14N 96.374,15.728 r0 bottom value=2u2 (schematic designator C53)
C53C "2.2uF 50V 0805" CAPC2012X14N 111.592,15.835 r0 bottom value=2u2 (schematic designator C53)
C53D "2.2uF 50V 0805" CAPC2012X14N 185.154,23.313 r0 bottom value=2u2 (schematic designator C53)
C54A "22uF 35V 1210 X5R" CAPC3225X18N 5.851,39.972 r180 bottom value=22u (schematic designator C54)
C54B "22uF 35V 1210 X5R" CAPC3225X18N 87.881,39.243 r180 bottom value=22u (schematic designator C54)
C54C "22uF 35V 1210 X5R" CAPC3225X18N 103.1,39.35 r180 bottom value=22u (schematic designator C54)
C54D "22uF 35V 1210 X5R" CAPC3225X18N 176.661,46.828 r180 bottom value=22u (schematic designator C54)
C55A "22uF 35V 1210 X5R" CAPC3225X18N 5.851,42.972 r180 bottom value=22u (schematic designator C55)
C55B "22uF 35V 1210 X5R" CAPC3225X18N 87.881,42.243 r180 bottom value=22u (schematic designator C55)
C55C "22uF 35V 1210 X5R" CAPC3225X18N 103.1,42.35 r180 bottom value=22u (schematic designator C55)
C55D "22uF 35V 1210 X5R" CAPC3225X18N 176.661,49.828 r180 bottom value=22u (schematic designator C55)
C56A "22uF 35V 1210 X5R" CAPC3225X18N 5.851,45.972 r180 bottom value=22u (schematic designator C56)
C56B "22uF 35V 1210 X5R" CAPC3225X18N 87.881,45.243 r180 bottom value=22u (schematic designator C56)
C56C "22uF 35V 1210 X5R" CAPC3225X18N 103.1,45.35 r180 bottom value=22u (schematic designator C56)
C56D "22uF 35V 1210 X5R" CAPC3225X18N 176.661,52.828 r180 bottom value=22u (schematic designator C56)
C57A "22uF 35V 1210 X5R" CAPC3225X18N 10.951,45.872 r0 bottom value=22u (schematic designator C57)
C57B "22uF 35V 1210 X5R" CAPC3225X18N 92.981,45.143 r0 bottom value=22u (schematic designator C57)
C57C "22uF 35V 1210 X5R" CAPC3225X18N 108.2,45.25 r0 bottom value=22u (schematic designator C57)
C57D "22uF 35V 1210 X5R" CAPC3225X18N 181.761,52.728 r0 bottom value=22u (schematic designator C57)
C58A "22uF 35V 1210 X5R" CAPC3225X18N 10.951,42.872 r0 bottom value=22u (schematic designator C58)
C58B "22uF 35V 1210 X5R" CAPC3225X18N 92.981,42.143 r0 bottom value=22u (schematic designator C58)
C58C "22uF 35V 1210 X5R" CAPC3225X18N 108.2,42.25 r0 bottom value=22u (schematic designator C58)
C58D "22uF 35V 1210 X5R" CAPC3225X18N 181.761,49.728 r0 bottom value=22u (schematic designator C58)
C59A "22uF 35V 1210 X5R" CAPC3225X18N 10.951,39.872 r0 bottom value=22u (schematic designator C59)
C59B "22uF 35V 1210 X5R" CAPC3225X18N 92.981,39.143 r0 bottom value=22u (schematic designator C59)
C59C "22uF 35V 1210 X5R" CAPC3225X18N 108.2,39.25 r0 bottom value=22u (schematic designator C59)
C59D "22uF 35V 1210 X5R" CAPC3225X18N 181.761,46.728 r0 bottom value=22u (schematic designator C59)
C60A "100nF 50V X7R 0603" CAPC1608X08N 10.451,18.272 r0 bottom value=100nF (schematic designator C60)
C60B "100nF 50V X7R 0603" CAPC1608X08N 92.481,17.543 r0 bottom value=100nF (schematic designator C60)
C60C "100nF 50V X7R 0603" CAPC1608X08N 107.7,17.65 r0 bottom value=100nF (schematic designator C60)
C60D "100nF 50V X7R 0603" CAPC1608X08N 181.261,25.128 r0 bottom value=100nF (schematic designator C60)
C61A "100nF 50V X7R 0603" CAPC1608X08N 7.551,18.472 r0 bottom value=100nF (schematic designator C61)
C61B "100nF 50V X7R 0603" CAPC1608X08N 89.581,17.743 r0 bottom value=100nF (schematic designator C61)
C61C "100nF 50V X7R 0603" CAPC1608X08N 104.8,17.85 r0 bottom value=100nF (schematic designator C61)
C61D "100nF 50V X7R 0603" CAPC1608X08N 178.361,25.328 r0 bottom value=100nF (schematic designator C61)
C62A "2.2uF 50V 0805" CAPC2012X14N 11.251,10.872 r0 bottom value=2u2 (schematic designator C62)
C62B "2.2uF 50V 0805" CAPC2012X14N 93.281,10.143 r0 bottom value=2u2 (schematic designator C62)
C62C "2.2uF 50V 0805" CAPC2012X14N 108.5,10.25 r0 bottom value=2u2 (schematic designator C62)
C62D "2.2uF 50V 0805" CAPC2012X14N 182.061,17.728 r0 bottom value=2u2 (schematic designator C62)
C63A "22uF 35V 1210 X5R" CAPC3225X18N 11.551,8.472 r0 bottom value=22u (schematic designator C63)
C63B "22uF 35V 1210 X5R" CAPC3225X18N 93.581,7.743 r0 bottom value=22u (schematic designator C63)
C63C "22uF 35V 1210 X5R" CAPC3225X18N 108.8,7.85 r0 bottom value=22u (schematic designator C63)
C63D "22uF 35V 1210 X5R" CAPC3225X18N 182.361,15.328 r0 bottom value=22u (schematic designator C63)
C64A "22uF 35V 1210 X5R" CAPC3225X18N 11.551,5.472 r0 bottom value=22u (schematic designator C64)
C64B "22uF 35V 1210 X5R" CAPC3225X18N 93.581,4.743 r0 bottom value=22u (schematic designator C64)
C64C "22uF 35V 1210 X5R" CAPC3225X18N 108.8,4.85 r0 bottom value=22u (schematic designator C64)
C64D "22uF 35V 1210 X5R" CAPC3225X18N 182.361,12.328 r0 bottom value=22u (schematic designator C64)
C65A "22uF 35V 1210 X5R" CAPC3225X18N 7.051,8.472 r180 bottom value=22u (schematic designator C65)
C65B "22uF 35V 1210 X5R" CAPC3225X18N 89.081,7.743 r180 bottom value=22u (schematic designator C65)
C65C "22uF 35V 1210 X5R" CAPC3225X18N 104.3,7.85 r180 bottom value=22u (schematic designator C65)
C65D "22uF 35V 1210 X5R" CAPC3225X18N 177.861,15.328 r180 bottom value=22u (schematic designator C65)
C66A "22uF 35V 1210 X5R" CAPC3225X18N 7.051,5.472 r180 bottom value=22u (schematic designator C66)
C66B "22uF 35V 1210 X5R" CAPC3225X18N 89.081,4.743 r180 bottom value=22u (schematic designator C66)
C66C "22uF 35V 1210 X5R" CAPC3225X18N 104.3,4.85 r180 bottom value=22u (schematic designator C66)
C66D "22uF 35V 1210 X5R" CAPC3225X18N 177.861,12.328 r180 bottom value=22u (schematic designator C66)
C67A "22uF 35V 1210 X5R" CAPC3225X18N 7.051,2.472 r180 bottom value=22u (schematic designator C67)
C67B "22uF 35V 1210 X5R" CAPC3225X18N 89.1,4.8 r180 top value=22u (schematic designator C67)
C67C "22uF 35V 1210 X5R" CAPC3225X18N 104.375,4.875 r180 top value=22u (schematic designator C67)
C67D "22uF 35V 1210 X5R" CAPC3225X18N 177.861,9.328 r180 bottom value=22u (schematic designator C67)
C68A "22uF 35V 1210 X5R" CAPC3225X18N 11.551,2.472 r0 bottom value=22u (schematic designator C68)
C68B "22uF 35V 1210 X5R" CAPC3225X18N 93.65,4.725 r0 top value=22u (schematic designator C68)
C68C "22uF 35V 1210 X5R" CAPC3225X18N 108.875,4.825 r0 top value=22u (schematic designator C68)
C68D "22uF 35V 1210 X5R" CAPC3225X18N 182.361,9.328 r0 bottom value=22u (schematic designator C68)
C69A "4.7uF 50V 0805" CAPC2012X14N 4.351,18.372 r180 bottom value=4u7 (schematic designator C69)
C69B "4.7uF 50V 0805" CAPC2012X14N 86.381,17.643 r180 bottom value=4u7 (schematic designator C69)
C69C "4.7uF 50V 0805" CAPC2012X14N 101.6,17.75 r180 bottom value=4u7 (schematic designator C69)
C69D "4.7uF 50V 0805" CAPC2012X14N 175.161,25.228 r180 bottom value=4u7 (schematic designator C69)
C70A "68pF 50V 0402" CAPC1005X06N 5.021,17.072 r180 bottom value=68p (schematic designator C70)
C70B "68pF 50V 0402" CAPC1005X06N 87.051,16.343 r180 bottom value=68p (schematic designator C70)
C70C "68pF 50V 0402" CAPC1005X06N 102.27,16.45 r180 bottom value=68p (schematic designator C70)
C70D "68pF 50V 0402" CAPC1005X06N 175.831,23.928 r180 bottom value=68p (schematic designator C70)
C71A "18nF 50V 0402" CAPC1005X06N 12.54,13.282 r0 bottom value=18n (schematic designator C71)
C71B "18nF 50V 0402" CAPC1005X06N 94.57,12.553 r0 bottom value=18n (schematic designator C71)
C71C "18nF 50V 0402" CAPC1005X06N 109.789,12.66 r0 bottom value=18n (schematic designator C71)
C71D "18nF 50V 0402" CAPC1005X06N 183.35,20.138 r0 bottom value=18n (schematic designator C71)
C72A "4.7nF 50V X7R 0402" CAPC1005X06N 3.574,16.61 r90 bottom value=4n7 (schematic designator C72)
C72B "4.7nF 50V X7R 0402" CAPC1005X06N 85.604,15.88 r90 bottom value=4n7 (schematic designator C72)
C72C "4.7nF 50V X7R 0402" CAPC1005X06N 100.823,15.987 r90 bottom value=4n7 (schematic designator C72)
C72D "4.7nF 50V X7R 0402" CAPC1005X06N 174.384,23.465 r90 bottom value=4n7 (schematic designator C72)
C73 "100nF 16V 0402" CAPC1005X06N 23.225,46.8 r0 top value=100n
C74 "100nF 16V 0402" CAPC1005X06N 18.119,58.102 r0 top value=100n
C75 "4.7uF 50V 0805" CAPC2012X14N 15.858,46.291 r180 top value=4u7
C76 "10n 50V X7R 0603" CAPC1608X08N 26.704,54.749 r270 top value=10n
C77 "1uF 16V X5R 0402" CAPC1005X06N 14.969,49.948 r90 top value=1u
C78 "100nF 16V 0402" CAPC1005X06N 12.148,50.443 r180 top value=100n
C80 "Capacitor 10 pF +/- 5% 50 V 0402" CAPC1005X55X25ML05T05 17.128,44.055 r270 top value=10pF
C81 "Capacitor 10 pF +/- 5% 50 V 0402" CAPC1005X55X25ML05T05 24.647,44.005 r90 top value=10pF
C82 "100nF 16V 0402" CAPC1005X06N 112.649,55.118 r90 top value=100n
C83 "10uF 35V 0603" CAPC1608X08N 106.299,57.785 r270 top value=10u
C84 "10uF 35V 0603" CAPC1608X08N 107.569,57.785 r270 top value=10u
C85 "22uF 35V 1210 X5R" CAPC3225X18N 106.045,53.412 r90 top value=22u
C86 "22uF 35V 1210 X5R" CAPC3225X18N 106.045,48.641 r270 top value=22u
C87 "100nF 16V 0402" CAPC1005X06N 102.235,55.245 r90 top value=100n
C88 "10uF 35V 0603" CAPC1608X08N 97.028,58.039 r270 top value=10u
C89 "10uF 35V 0603" CAPC1608X08N 95.758,58.039 r270 top value=10u
C90 "22uF 35V 1210 X5R" CAPC3225X18N 95.504,54.102 r90 top value=22u
C91 "22uF 35V 1210 X5R" CAPC3225X18N 95.504,49.276 r270 top value=22u
C92 "100nF 16V 0402" CAPC1005X06N 123.19,55.118 r90 top value=100n
C93 "10uF 35V 0603" CAPC1608X08N 116.84,57.785 r270 top value=10u
C94 "10uF 35V 0603" CAPC1608X08N 118.11,57.785 r270 top value=10u
C95 "22uF 35V 1210 X5R" CAPC3225X18N 116.586,53.975 r90 top value=22u
C96 "22uF 35V 1210 X5R" CAPC3225X18N 116.586,49.276 r270 top value=22u
D1 "SMAJ16CA" DO-214AC 140.462,53.848 r90 bottom
F1 "3557-2" 3557-2-Footprint-1 128.397,52.578 r90 top
F2 "1812L160/12DR" LFUS-1812L16012_V 40.425,42.66 r270 top
J1 "12401832E402A" FP-12401832E402A-MFG 50.963,57.858 r180 top
J2 "USB 3 Type A" 692121030100 35.95,54.975 r180 top
J3A "12401832E402A" FP-12401832E402A-MFG 38.85,5.85 r0 top (schematic designator J3)
J3B "12401832E402A" FP-12401832E402A-MFG 53.125,5.858 r0 top (schematic designator J3)
J3C "12401832E402A" FP-12401832E402A-MFG 136.88,5.555 r0 top (schematic designator J3)
J3D "12401832E402A" FP-12401832E402A-MFG 151.15,5.683 r0 top (schematic designator J3)
J4 "UART" "3x0.1\" Header-Footprint-1" 8.242,61.306 r0 top
J5 "J-LINK" "3x0.1\" Header-Footprint-1" 19.557,61.306 r0 top
J6 "172448-0008" FP-172448-0008-MFG 142.367,56.134 r180 top
L1A "4.7uH 24A 20%" INDP134126X58N 8.551,26.772 r270 bottom value=4u7 (schematic designator L1)
L1B "4.7uH 24A 20%" INDP134126X58N 90.581,26.043 r270 bottom value=4u7 (schematic designator L1)
L1C "4.7uH 24A 20%" INDP134126X58N 105.8,26.15 r270 bottom value=4u7 (schematic designator L1)
L1D "4.7uH 24A 20%" INDP134126X58N 179.361,33.628 r270 bottom value=4u7 (schematic designator L1)
L2 "10uH 2.5A SL0420-100M" "10uH 2.5A SL0420-100M-Footprint-1" 109.982,52.578 r270 top value=10u
L3 "10uH 2.5A SL0420-100M" "10uH 2.5A SL0420-100M-Footprint-1" 99.568,52.705 r270 top value=10u
L4 "10uH 2.5A SL0420-100M" "10uH 2.5A SL0420-100M-Footprint-1" 120.523,52.578 r270 top value=10u
NT1A "8mil Net Tie" "Net Tie SMD-Footprint-1" 7.156,12.569 r225 bottom net-tie (schematic designator NT1)
NT1B "8mil Net Tie" "Net Tie SMD-Footprint-1" 89.186,11.839 r225 bottom net-tie (schematic designator NT1)
NT1C "8mil Net Tie" "Net Tie SMD-Footprint-1" 104.405,11.946 r225 bottom net-tie (schematic designator NT1)
NT1D "8mil Net Tie" "Net Tie SMD-Footprint-1" 177.966,19.424 r225 bottom net-tie (schematic designator NT1)
NT2A "8mil Net Tie" "Net Tie SMD-Footprint-1" 7.825,12.509 r270 bottom net-tie (schematic designator NT2)
NT2B "8mil Net Tie" "Net Tie SMD-Footprint-1" 89.854,11.779 r270 bottom net-tie (schematic designator NT2)
NT2C "8mil Net Tie" "Net Tie SMD-Footprint-1" 105.073,11.887 r270 bottom net-tie (schematic designator NT2)
NT2D "8mil Net Tie" "Net Tie SMD-Footprint-1" 178.635,19.365 r270 bottom net-tie (schematic designator NT2)
Q1A "CSD17579Q3A" FP-DNH0008A-MFG 7.026,36.322 r90 bottom (schematic designator Q1)
Q1B "CSD17579Q3A" FP-DNH0008A-MFG 89.056,35.593 r90 bottom (schematic designator Q1)
Q1C "CSD17579Q3A" FP-DNH0008A-MFG 104.275,35.7 r90 bottom (schematic designator Q1)
Q1D "CSD17579Q3A" FP-DNH0008A-MFG 177.836,43.178 r90 bottom (schematic designator Q1)
Q2A "CSD17579Q3A" FP-DNH0008A-MFG 10.896,36.172 r180 bottom (schematic designator Q2)
Q2B "CSD17579Q3A" FP-DNH0008A-MFG 92.926,35.443 r180 bottom (schematic designator Q2)
Q2C "CSD17579Q3A" FP-DNH0008A-MFG 108.145,35.55 r180 bottom (schematic designator Q2)
Q2D "CSD17579Q3A" FP-DNH0008A-MFG 181.706,43.028 r180 bottom (schematic designator Q2)
R1 "200k 1% 0402" RESC1005X04M 53.9,42.9 r270 top value=200k
R2 "910k 1% 0402" RESC1005X04M 49.1,39 r0 top value=910k
R3 "0 Ohm 1% 0603" RESC1508X05M 48.815,41.4 r180 top value=0
R4 "0 Ohm 1% 0603" RESC1508X05M 48.785,40.1 r180 top value=0
R5 "0 Ohm 1% 0603" RESC1508X05M 55.1,43.3 r270 top value=0
R6 "0 Ohm 1% 0603" RESC1508X05M 47.4,45.3 r90 top value=0
R7 "330R 1% 0402" RESC1005X04M 54.748,50.921 r180 top value=330R
R8 "5k1 1% 0603" RESC1508X05M 1.3,57.55 r90 top value=5k1
R9 "22KR2F" RESC0402(1005)_L 65.67,16.075 r180 top value=22k
R10 "10k 1% 0402" RESC1005X04M 65.545,16.875 r0 top value=10k
R11 "10k 1% 0402" RESC1005X04M 114.395,16.7 r180 top value=10k
R12 "10k 1% 0402" RESC1005X04M 114.395,17.525 r0 top value=10k
R13 "10k 1% 0402" RESC1005X04M 169.575,47.325 r270 top value=10k
R14 "330R 1% 0402" RESC1005X04M 43.35,44.925 r0 top value=330R
R15 "47k 1% 0402" RESC1005X04M 67.375,38.089 r0 top value=47k
R16 "82k 1% 0402" RESC1005X04M 67.375,38.979 r0 top value=82k
R17 "12k 1% 0402" RESC1005X04M 64.275,41.869 r180 top value=12k
R18 "10k 1% 0402" RESC1005X04M 79,40.375 r270 top value=10k
R19 "100k 1% 0402" RESC1005X04M 78.587,48.205 r180 bottom value=100k
R20 "10k 1% 0402" RESC1005X04M 71.5,60.885 r0 bottom value=10k
R21 "10k 1% 0402" RESC1005X04M 64.7,40.3 r90 top value=10k
R22 "100k 1% 0402" RESC1005X04M 78.587,49.043 r180 bottom value=100k
R23 "100k 1% 0402" RESC1005X04M 78.587,49.881 r180 bottom value=100k
R24 "10k 1% 0402" RESC1005X04M 72.826,55.232 r90 top value=10k
R25 "10k 1% 0402" RESC1005X04M 71.81,55.232 r90 top value=10k
R26 "10k 1% 0402" RESC1005X04M 70.794,55.232 r90 top value=10k
R27 "4.7k 5% 0402" RESC1005X04M 66.962,54.175 r180 top value=4k7
R28 "100k 1% 0402" RESC1005X04M 78.587,50.719 r180 bottom value=100k
R29 "100k 1% 0402" RESC1005X04M 78.587,51.557 r180 bottom value=100k
R30 "4.7k 5% 0402" RESC1005X04M 64.275,51.469 r180 top value=4k7
R31 "0 Ohm 1% 0603" RESC1508X05M 64.475,53.15 r180 top value=0
R32 "200k 1% 0402" RESC1005X04M 81.625,40.4 r90 top value=200k
R33 "200k 1% 0402" RESC1005X04M 80.725,40.4 r90 top value=200k
R34 "200k 1% 0402" RESC1005X04M 79.825,40.4 r90 top value=200k
R35A "100k 1% 0402" RESC1005X04M 38.259,17.413 r0 top value=100k (schematic designator R35)
R35B "100k 1% 0402" RESC1005X04M 52.534,17.421 r0 top value=100k (schematic designator R35)
R35C "100k 1% 0402" RESC1005X04M 136.289,17.118 r0 top value=100k (schematic designator R35)
R35D "100k 1% 0402" RESC1005X04M 150.559,17.246 r0 top value=100k (schematic designator R35)
R36A "330R 1% 0402" RESC1005X04M 34.8,12.9 r0 top value=330R (schematic designator R36)
R36B "330R 1% 0402" RESC1005X04M 49.075,12.908 r0 top value=330R (schematic designator R36)
R36C "330R 1% 0402" RESC1005X04M 132.83,12.605 r0 top value=330R (schematic designator R36)
R36D "330R 1% 0402" RESC1005X04M 147.1,12.733 r0 top value=330R (schematic designator R36)
R37A "10k 1% 0402" RESC1005X04M 42.425,20.9 r90 top value=10k (schematic designator R37)
R37B "10k 1% 0402" RESC1005X04M 56.7,20.908 r90 top value=10k (schematic designator R37)
R37C "10k 1% 0402" RESC1005X04M 140.455,20.605 r90 top value=10k (schematic designator R37)
R37D "10k 1% 0402" RESC1005X04M 154.725,20.733 r90 top value=10k (schematic designator R37)
R38A "0 Ohm 1% 0402" RESC1005X04M 16.545,20.175 r270 top value=0 (schematic designator R38)
R38B "0 Ohm 1% 0402" RESC1005X04M 66.045,19.975 r270 top value=0 (schematic designator R38)
R38C "0 Ohm 1% 0402" RESC1005X04M 114.895,20.629 r270 top value=0 (schematic designator R38)
R38D "0 Ohm 1% 0402" RESC1005X04M 169.572,43.75 r90 top value=0 (schematic designator R38)
R39A "10k 1% 0402" RESC1005X04M 29.847,11.812 r90 top value=10k (schematic designator R39)
R39B "10k 1% 0402" RESC1005X04M 79.347,11.612 r90 top value=10k (schematic designator R39)
R39C "10k 1% 0402" RESC1005X04M 128.197,12.112 r90 top value=10k (schematic designator R39)
R39D "10k 1% 0402" RESC1005X04M 156.253,52.113 r270 top value=10k (schematic designator R39)
R40A "10k 1% 0402" RESC1005X04M 27.992,11.812 r90 top value=10k (schematic designator R40)
R40B "10k 1% 0402" RESC1005X04M 77.492,11.612 r90 top value=10k (schematic designator R40)
R40C "10k 1% 0402" RESC1005X04M 126.342,12.112 r90 top value=10k (schematic designator R40)
R40D "10k 1% 0402" RESC1005X04M 158.108,52.113 r270 top value=10k (schematic designator R40)
R41A "10k 1% 0402" RESC1005X04M 28.907,11.786 r90 top value=10k (schematic designator R41)
R41B "10k 1% 0402" RESC1005X04M 78.407,11.586 r90 top value=10k (schematic designator R41)
R41C "10k 1% 0402" RESC1005X04M 127.257,12.086 r90 top value=10k (schematic designator R41)
R41D "10k 1% 0402" RESC1005X04M 157.193,52.139 r270 top value=10k (schematic designator R41)
R42A "10k 1% 0402" RESC1005X04M 30.5,16.3 r180 top value=10k (schematic designator R42)
R42B "10k 1% 0402" RESC1005X04M 80,16.1 r180 top value=10k (schematic designator R42)
R42C "10k 1% 0402" RESC1005X04M 128.85,16.6 r180 top value=10k (schematic designator R42)
R42D "10k 1% 0402" RESC1005X04M 155.6,47.625 r0 top value=10k (schematic designator R42)
R43A "10k 1% 0402" RESC1005X04M 30.5,14.5 r180 top value=10k (schematic designator R43)
R43B "10k 1% 0402" RESC1005X04M 80,14.3 r180 top value=10k (schematic designator R43)
R43C "10k 1% 0402" RESC1005X04M 128.85,14.8 r180 top value=10k (schematic designator R43)
R43D "10k 1% 0402" RESC1005X04M 155.6,49.425 r0 top value=10k (schematic designator R43)
R44A "10k 1% 0402" RESC1005X04M 30.5,15.4 r180 top value=10k (schematic designator R44)
R44B "10k 1% 0402" RESC1005X04M 80,15.2 r180 top value=10k (schematic designator R44)
R44C "10k 1% 0402" RESC1005X04M 128.85,15.7 r180 top value=10k (schematic designator R44)
R44D "10k 1% 0402" RESC1005X04M 155.6,48.525 r0 top value=10k (schematic designator R44)
R45A "0 Ohm 1% 0402" RESC1005X04M 30.5,20.9 r0 top value=0 (schematic designator R45)
R45B "0 Ohm 1% 0402" RESC1005X04M 80,20.7 r0 top value=0 (schematic designator R45)
R45C "0 Ohm 1% 0402" RESC1005X04M 128.85,21.2 r0 top value=0 (schematic designator R45)
R45D "0 Ohm 1% 0402" RESC1005X04M 155.6,43.025 r180 top value=0 (schematic designator R45)
R46A "0 Ohm 1% 0402" RESC1005X04M 30.5,19.1 r0 top value=0 (schematic designator R46)
R46B "0 Ohm 1% 0402" RESC1005X04M 80,18.9 r0 top value=0 (schematic designator R46)
R46C "0 Ohm 1% 0402" RESC1005X04M 128.85,19.4 r0 top value=0 (schematic designator R46)
R46D "0 Ohm 1% 0402" RESC1005X04M 155.6,44.825 r180 top value=0 (schematic designator R46)
R47A "0 Ohm 1% 0402" RESC1005X04M 30.5,18.2 r0 top value=0 (schematic designator R47)
R47B "0 Ohm 1% 0402" RESC1005X04M 80,18 r0 top value=0 (schematic designator R47)
R47C "0 Ohm 1% 0402" RESC1005X04M 128.85,18.5 r0 top value=0 (schematic designator R47)
R47D "0 Ohm 1% 0402" RESC1005X04M 155.6,45.725 r180 top value=0 (schematic designator R47)
R48A "0 Ohm 1% 0402" RESC1005X04M 30.5,20 r0 top value=0 (schematic designator R48)
R48B "0 Ohm 1% 0402" RESC1005X04M 80,19.8 r0 top value=0 (schematic designator R48)
R48C "0 Ohm 1% 0402" RESC1005X04M 128.85,20.3 r0 top value=0 (schematic designator R48)
R48D "0 Ohm 1% 0402" RESC1005X04M 155.6,43.925 r180 top value=0 (schematic designator R48)
R49A "1M 1% 0402" RESC1005X04M 17.405,17.925 r90 top value=1M (schematic designator R49)
R49B "1M 1% 0402" RESC1005X04M 66.905,17.725 r90 top value=1M (schematic designator R49)
R49C "1M 1% 0402" RESC1005X04M 115.755,18.379 r90 top value=1M (schematic designator R49)
R49D "1M 1% 0402" RESC1005X04M 168.712,46 r270 top value=1M (schematic designator R49)
R50A "162k 1% 0402" RESC1005X04M 18.295,17.925 r270 top value=162k (schematic designator R50)
R50B "162k 1% 0402" RESC1005X04M 67.795,17.725 r270 top value=162k (schematic designator R50)
R50C "162k 1% 0402" RESC1005X04M 116.645,18.379 r270 top value=162k (schematic designator R50)
R50D "162k 1% 0402" RESC1005X04M 167.822,46 r90 top value=162k (schematic designator R50)
R51A "100k 1% 0402" RESC1005X04M 29,22.9 r90 top value=100k (schematic designator R51)
R51B "100k 1% 0402" RESC1005X04M 78.5,22.7 r90 top value=100k (schematic designator R51)
R51C "100k 1% 0402" RESC1005X04M 127.35,23.2 r90 top value=100k (schematic designator R51)
R51D "100k 1% 0402" RESC1005X04M 157.1,41.025 r270 top value=100k (schematic designator R51)
R52A "4.7k 5% 0402" RESC1005X04M 18.4,5.6 r0 top value=4k7 (schematic designator R52)
R52B "4.7k 5% 0402" RESC1005X04M 67.9,5.4 r0 top value=4k7 (schematic designator R52)
R52C "4.7k 5% 0402" RESC1005X04M 116.75,5.9 r0 top value=4k7 (schematic designator R52)
R52D "4.7k 5% 0402" RESC1005X04M 167.7,58.325 r180 top value=4k7 (schematic designator R52)
R53A "4.7k 5% 0402" RESC1005X04M 17,7 r0 top value=4k7 (schematic designator R53)
R53B "4.7k 5% 0402" RESC1005X04M 66.5,6.8 r0 top value=4k7 (schematic designator R53)
R53C "4.7k 5% 0402" RESC1005X04M 115.35,7.3 r0 top value=4k7 (schematic designator R53)
R53D "4.7k 5% 0402" RESC1005X04M 169.1,56.925 r180 top value=4k7 (schematic designator R53)
R54A "4.7k 5% 0402" RESC1005X04M 18.3,8.3 r0 top value=4k7 (schematic designator R54)
R54B "4.7k 5% 0402" RESC1005X04M 67.8,8.1 r0 top value=4k7 (schematic designator R54)
R54C "4.7k 5% 0402" RESC1005X04M 116.65,8.6 r0 top value=4k7 (schematic designator R54)
R54D "4.7k 5% 0402" RESC1005X04M 167.8,55.625 r180 top value=4k7 (schematic designator R54)